# Altium PCB esp32c3phils.PcbDoc (part 1 of 3)
Units mil, origin at the board's own origin, x right, y up, seen from the top; angles counter-clockwise.
Board outline 2756.04 x 1955.51 mil, 6 copper layers (Top Layer, Layer 1, Layer 3, Layer 4, Layer 2, Bottom Layer), stack 54.512 mil thick; 66 components, 48 nets, 263 pads, 93 vias.
Unrouted connection lines stored in the file: 25.
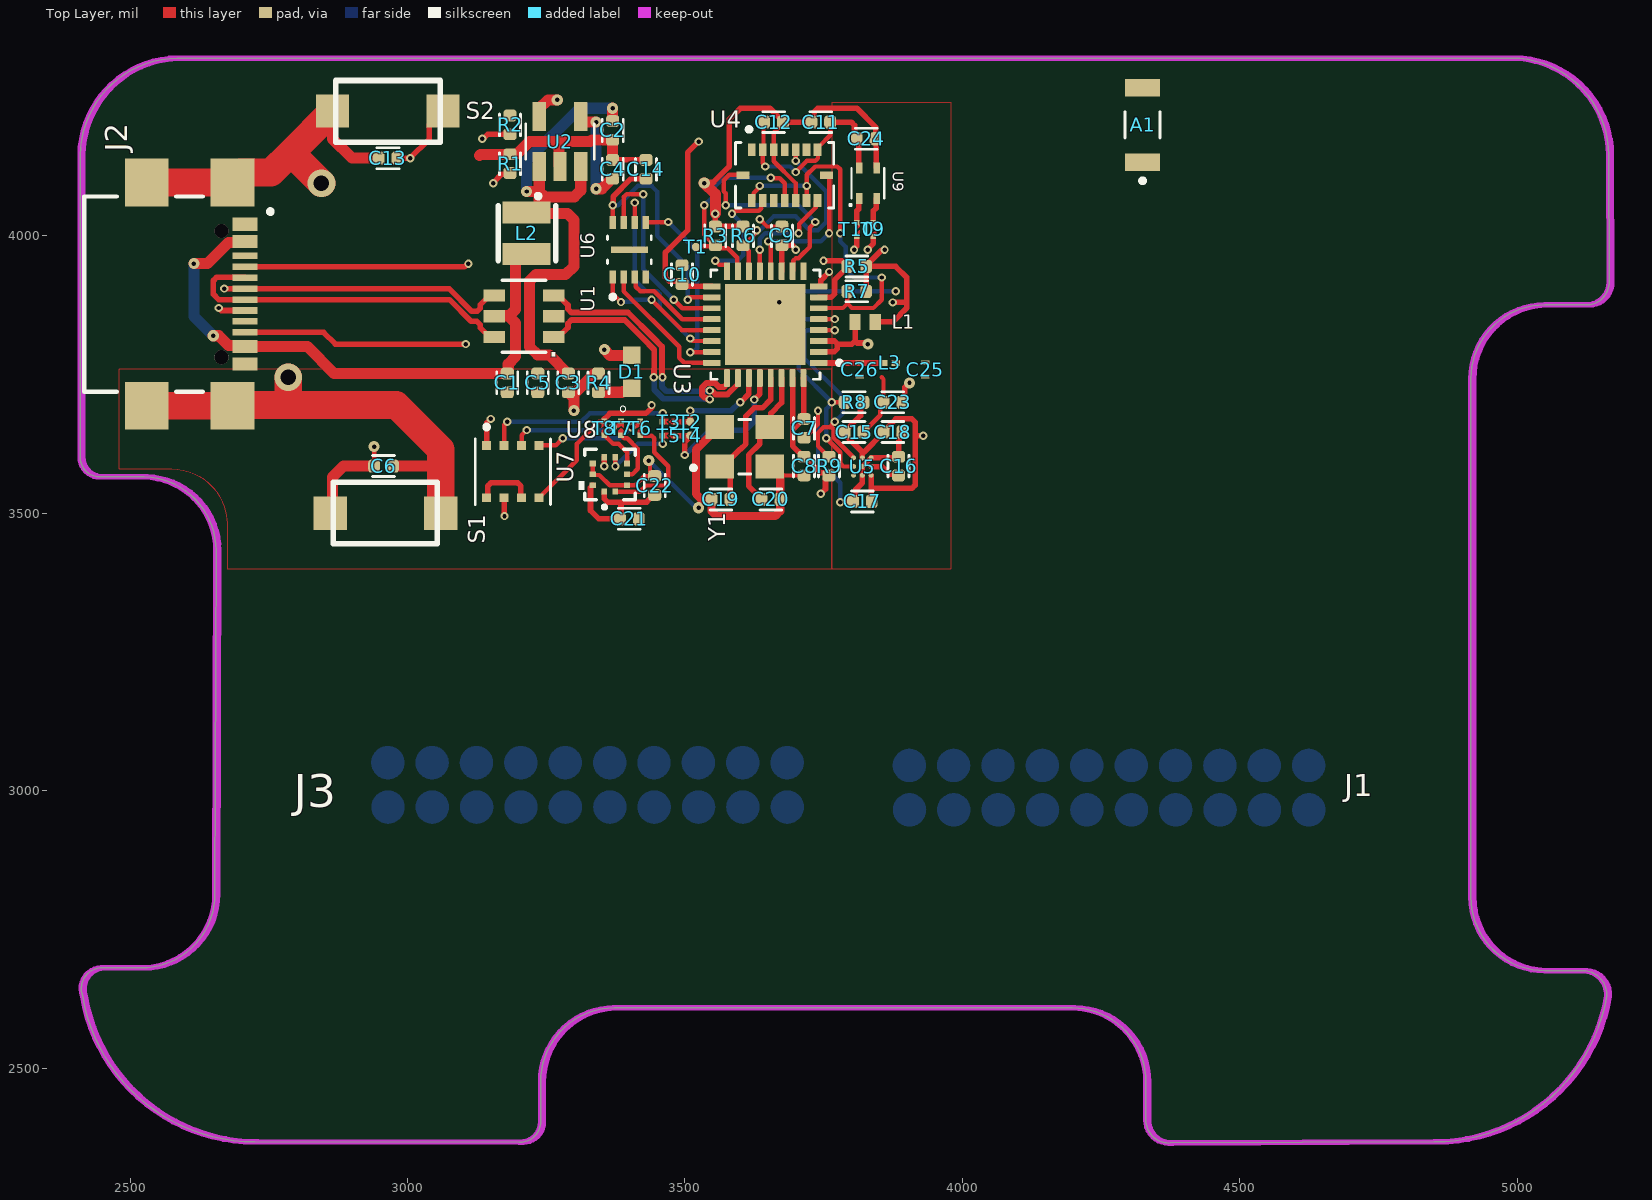
[diagram p0: Top Layer view]
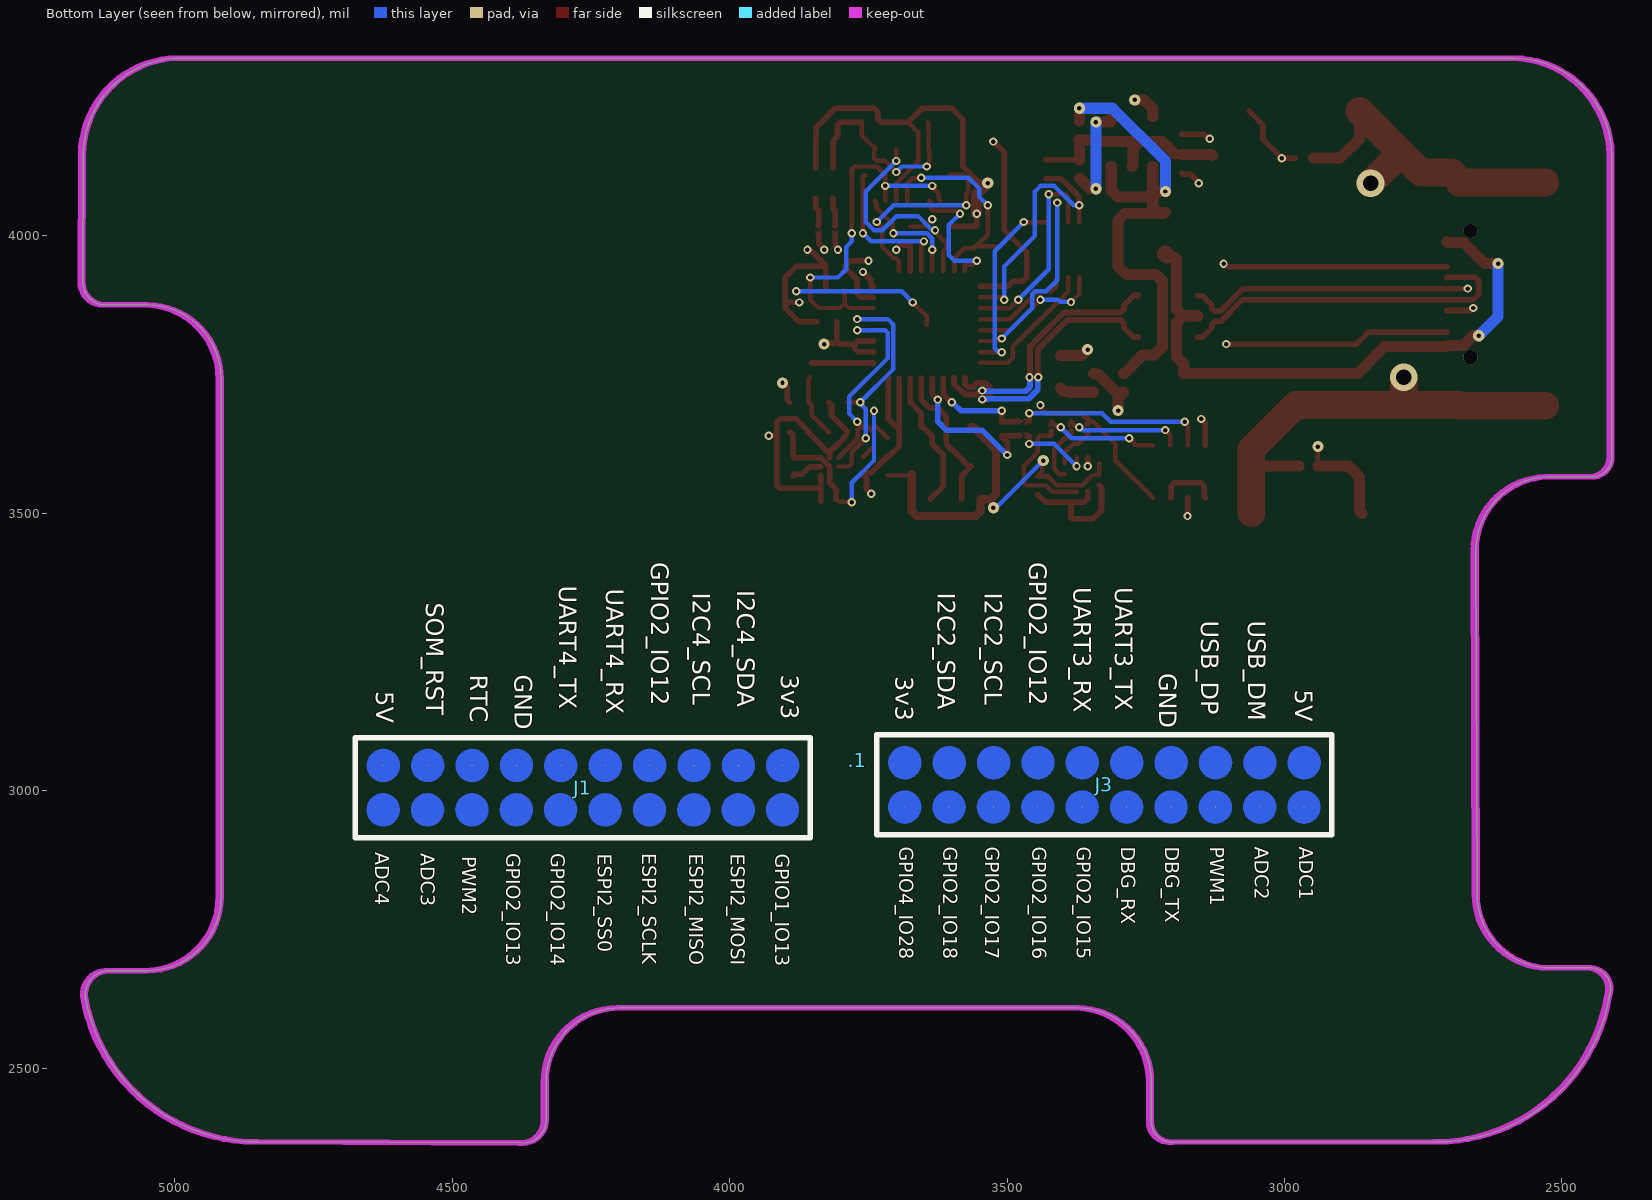
[diagram p1: Bottom Layer view, seen from below]
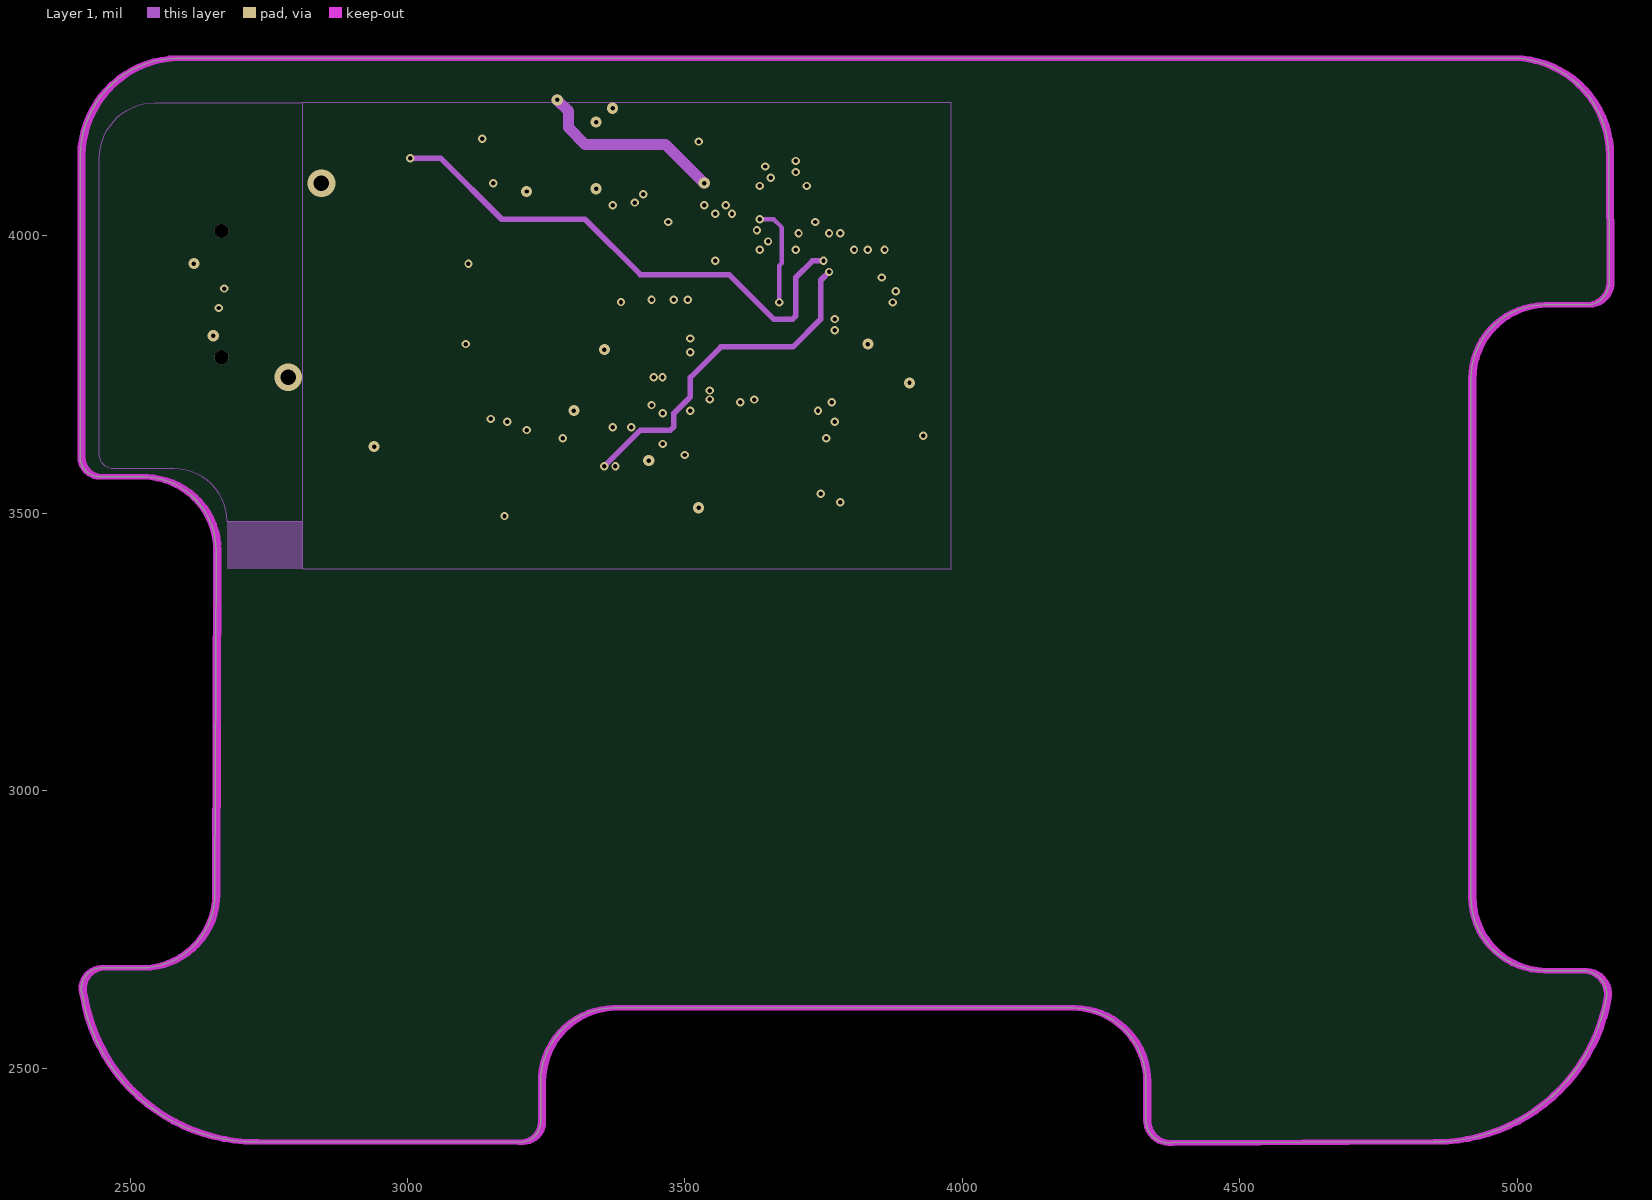
[diagram p2: Layer 1]
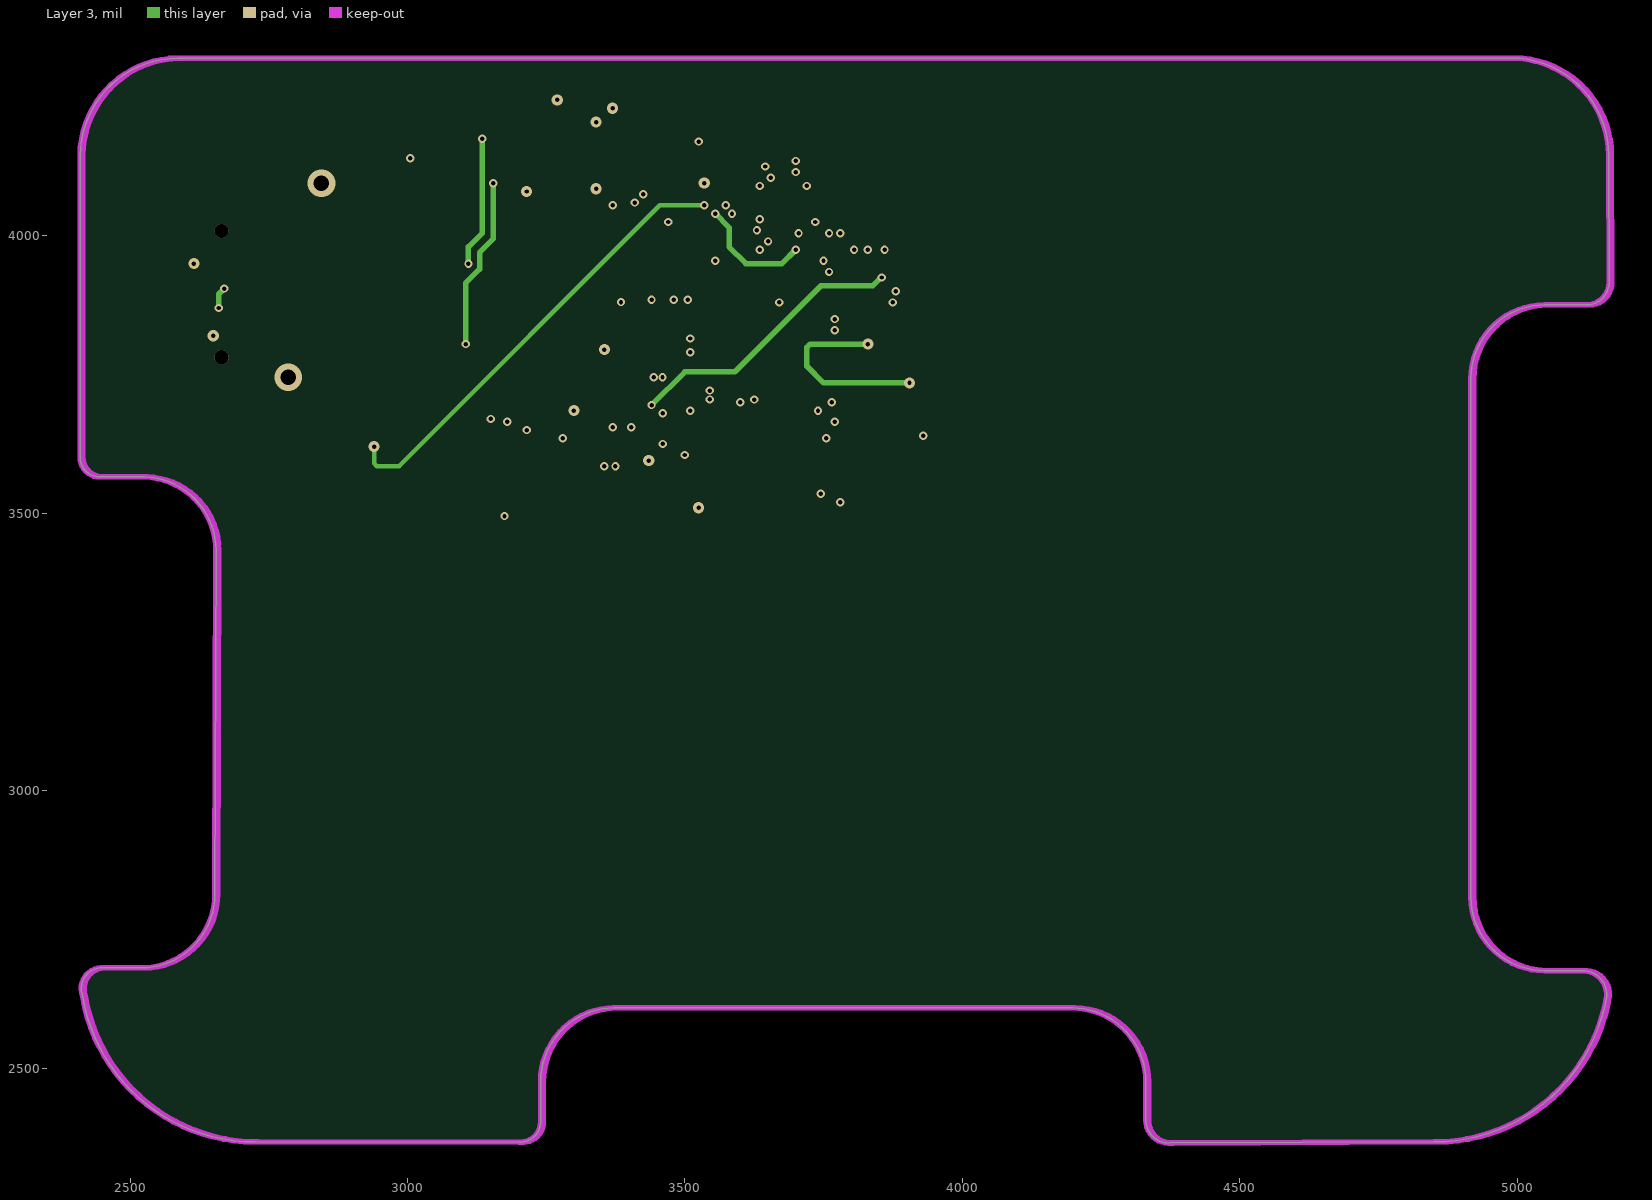
[diagram p3: Layer 3]
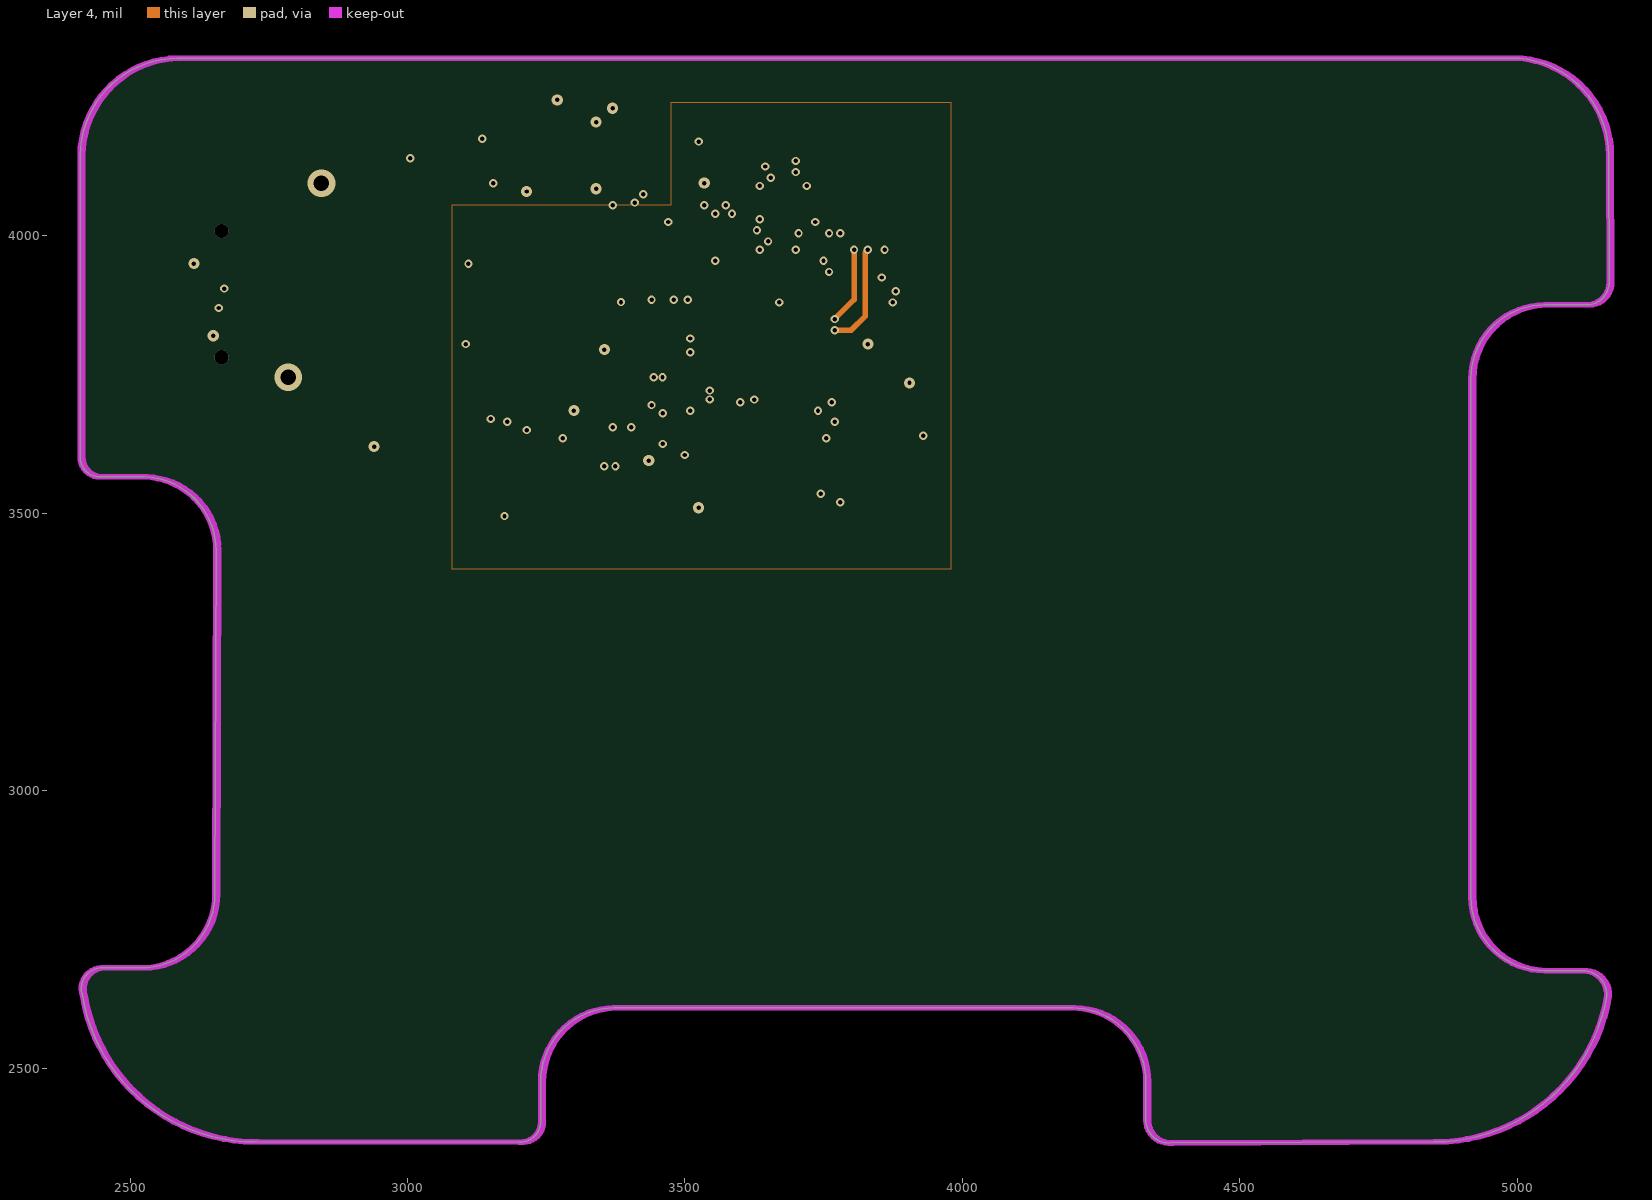
[diagram p4: Layer 4]
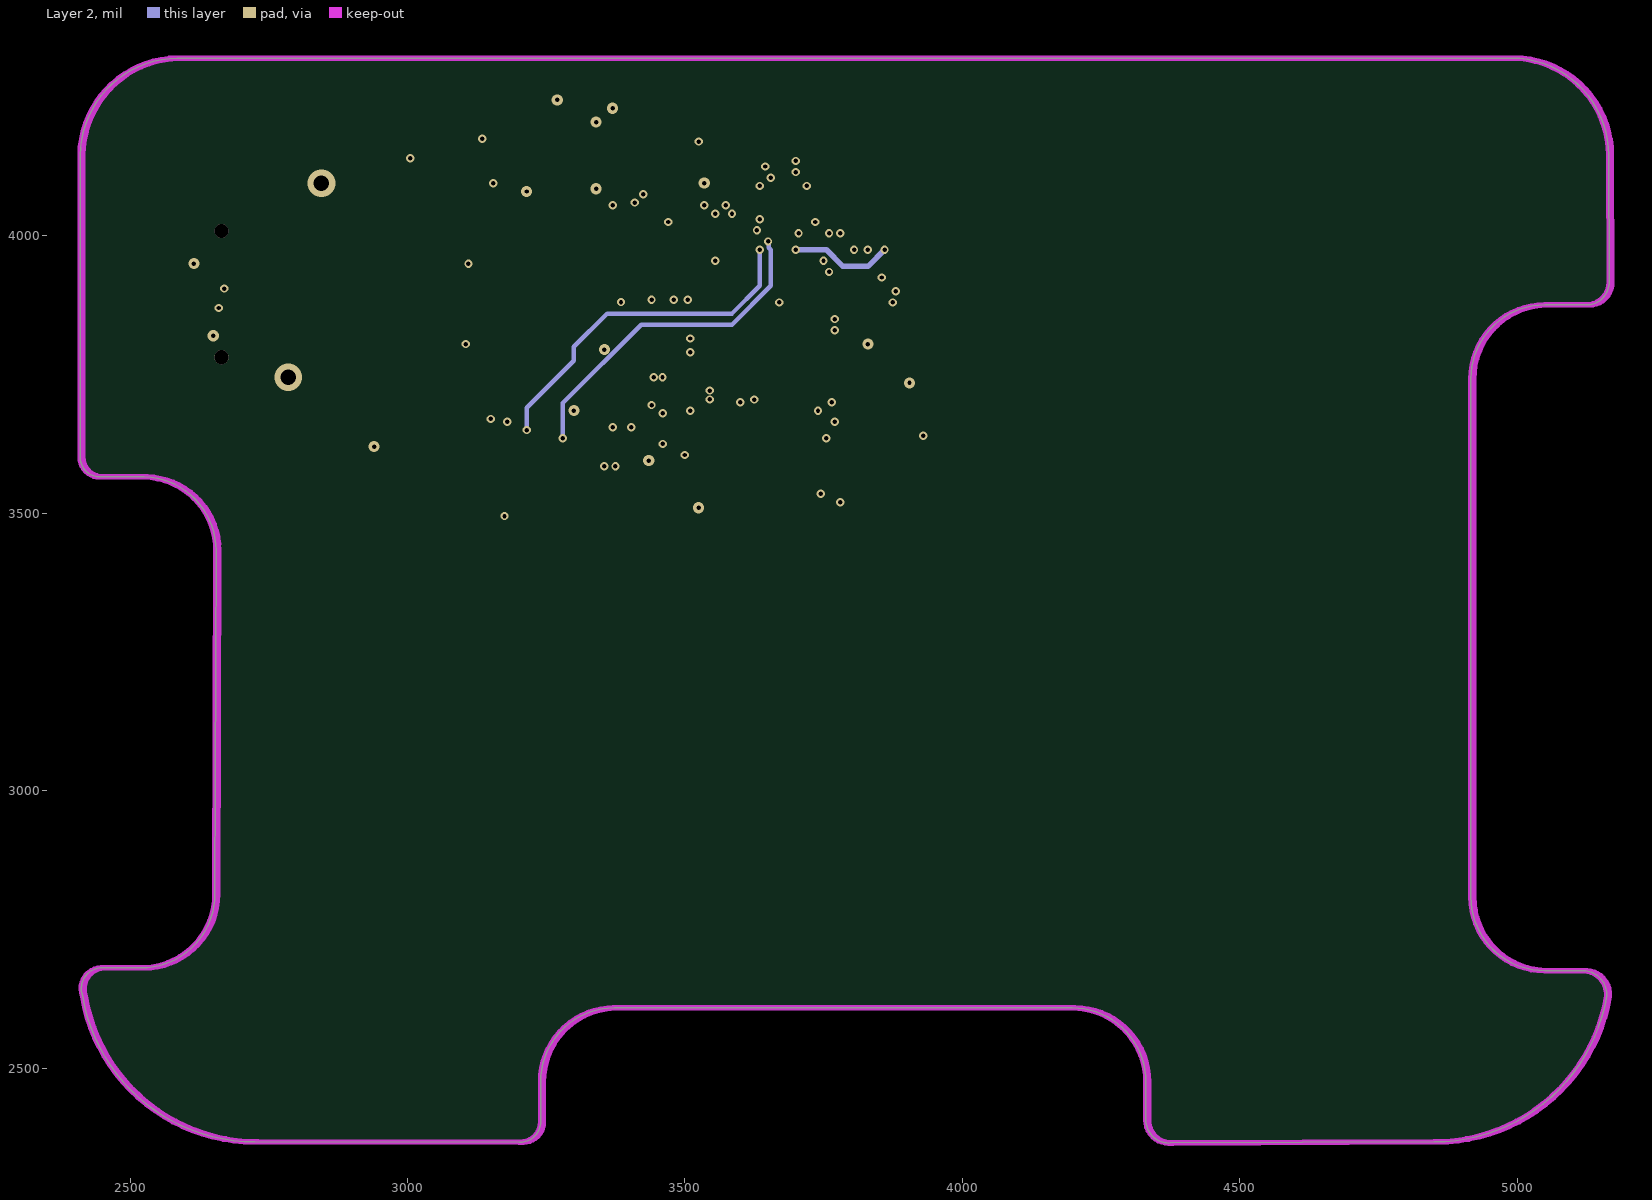
[diagram p5: Layer 2]
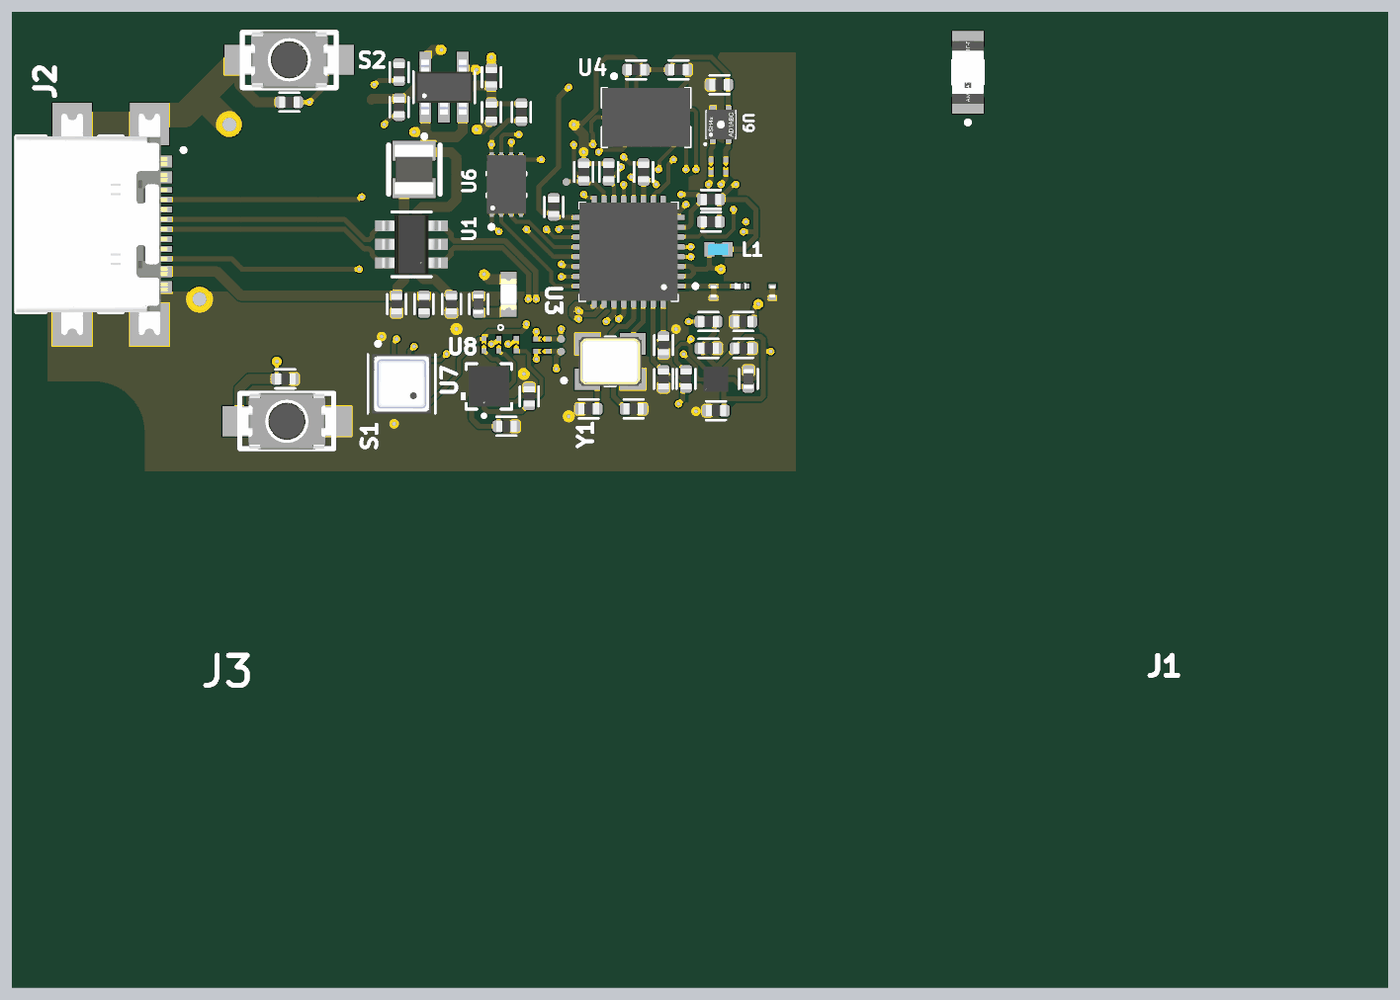
[diagram p7: 3D render of the assembled board from above, using the file's embedded part models]

## Layer stack, top to bottom
Top Solder: solder mask 0.4, Solder Resist, Dk 3.5
Top Layer: signal copper 1.4
Dielectric 2: prepreg 2.8, PP-006, Dk 4.1
Layer 1: signal copper 1.378
Dielectric 4: prepreg 2.8, PP-006, Dk 4.1
Layer 3: signal copper 1.378
Dielectric 1: core 35, Core-041, Dk 4.8
Layer 4: signal copper 1.378
Dielectric 5: prepreg 2.8, PP-006, Dk 4.1
Layer 2: signal copper 1.378
Dielectric 3: prepreg 2.8, PP-006, Dk 4.1
Bottom Layer: signal copper 1.4
Bottom Solder: solder mask 0.4, Solder Resist, Dk 3.5

## Board outline
2414.64,2629.47 ccw(c2725.14,2681.79) 2725,2366.91 3201.38,2366.6 3204.03,2366.61 ccw(c3204.03,2402.59) 3240.01,2402.59 3240,2475.41 cw(c3373.07,2475.41) 3373.07,2608.48 4198.07,2608.48 cw(c4198.08,2475.41) 4331.15,2475.41 4331.1,2475.45 4331.1,2405.95 4331.07,2405.98 ccw(c4372.11,2405.98) 4372.11,2364.95 4374.61,2365 4850.98,2366.91 ccw(c4850.98,2681.87) 5161.53,2629.35 ccw(c5118.26,2632.4) 5120.24,2675.73 5120.86,2675.45 5050,2675.45 cw(c5050,2808.52) 4916.93,2808.52 4916.93,3742.38 cw(c5050,3742.38) 5050,3875.45 5125,3875.45 ccw(c5125,3916.49) 5166.04,3916.49 5165,4145.45 ccw(c4990,4145.45) 4990,4320.45 2585,4320.45 ccw(c2587.5,4142.95) 2410,4145.2 2410,3600.45 2410.05,3601.43 ccw(c2446.02,3601.43) 2446.02,3565.45 2525,3565.45 2526.01,3565.42 cw(c2522.5,3432.97) 2655,3432.97 2655,3435.45 2653.07,2813.53 cw(c2520,2813.52) 2520,2680.45 2455,2680.49 ccw(c2450,2642.97)

## Design rules (kind name [scope] priority, off if disabled: settings)
Clearance Clearance_RF [InNetClass('RF')] p1: gap=1 ignorepadtopadclearanceinfootprint=FALSE except(0: Arc-Hole Track-Hole SMDPad-Hole THPad-Hole Via-Hole Fill-Hole Poly-Hole Region-Hole Text-Hole; 4: Track-Poly SMDPad-Poly THPad-Poly Via-Poly)
Clearance [NOT INNetClass('RF')] p2: gap=1 ignorepadtopadclearanceinfootprint=FALSE except(0: Arc-Hole Track-Hole SMDPad-Hole THPad-Hole Via-Hole Fill-Hole Poly-Hole Region-Hole Text-Hole; 3: Track-Poly SMDPad-Poly THPad-Poly Via-Poly)
ComponentClearance [All] p1: gap=5 collisioncheckmode=3 verticalgap=5 showdistances=FALSE
DiffPairsRouting [InDifferentialPair('USB2')] p1: maxlimit=8 minlimit=2 mostfreqgap=5 toplayer_mingap=3 toplayer_maxgap=3 toplayer_prefgap=3 toplayer_minwidth=10.6 toplayer_maxwidth=10.6 toplayer_prefwidth=10.6 midlayer1_minwidth=15 midlayer1_maxwidth=15 midlayer1_prefwidth=1.71 midlayer2_minwidth=15 midlayer2_maxwidth=15 midlayer2_prefwidth=2.29 midlayer3_minwidth=15 midlayer3_maxwidth=15 midlayer3_prefwidth=2.29 midlayer4_minwidth=15 midlayer4_maxwidth=15 midlayer4_prefwidth=1.71 bottomlayer_mingap=3 bottomlayer_maxgap=3 bottomlayer_prefgap=3 bottomlayer_minwidth=10.6 bottomlayer_maxwidth=10.6 bottomlayer_prefwidth=10.6 impedanceprofiledriven=TRUE impedanceprofileid={8FD7E2D9-7964-421B-845E-F3E801E4E64C} impedanceprofilevalue=90.000000 maxuncoupledlength=500
PolygonConnect [All] p1: connectstyle=Direct reliefconductorwidth=10 reliefentries=4 polygonreliefangle="90 Angle" airgapwidth=10
RoomDefinition esp32c3phils [InComponentClass('esp32c3phils')] p1: confinementstyle=ConfineOut formatcopy=TRUE lockcomponents=FALSE outline 4555,4120 4555,4170 4470,4170 4470,4120
RoutingVias [All] p1: holewidth=8 width=20 viastyle="Through Hole" minholewidth=8 minwidth=15 maxholewidth=28 maxwidth=50
SolderMaskExpansion [All] p1: expansion=2 istentingtop=FALSE
Width WidthRF [InNetClass('RF')] p1: maxlimit=10.6 minlimit=10.6 preferedwidth=10.6 midlayer1_prefwidth=1.45 midlayer4_prefwidth=1.45 impedanceprofiledriven=TRUE impedanceprofileid={8E2AE9DD-DE4D-46E3-B48A-83CCAB148859} impedanceprofilevalue=50.000000 minimp=50.000000 maximp=50.000000 favimp=50.000000
Width [All] p2: maxlimit=50 minlimit=8 preferedwidth=10
28 further rules are at their usual default settings.

## Classes and differential pairs
net class POWER: +3V3 AVDD
net class RF: ANT_IN LNA_IN
differential pair USB1: +USB1_P -USB1_N
differential pair USB2: +USB2_P -USB2_N

## Components (designator, comment, footprint, x,y, rotation, side; value= is the part's Value field where it differs from the comment)
.1 "_" ? 3770,3055 r0 bottom
A1 "ANT" XDCR_AMCA31-2R450G-S1F-T3 4325,4200 r90 top
C1 "104" CAPC1005X55N2 3180,3735 r270 top
C2 "104" CAPC1005X55N2 3370,4190 r270 top
C3 "C106" RC0402 3290,3735 r270 top
C4 "104" CAPC1005X55N2 3370,4120 r90 top
C5 "106" RC0402 3235,3735 r90 top
C6 "104" CAPC1005X55N2 2956.93,3585 r0 top
C7 "104" CAPC1005X55N2 3715,3653.07 r90 top
C8 "104" CAPC1005X55N2 3715,3585 r90 top
C9 "104" CAPC1005X55N2 3675,4000 r270 top
C10 "104" CAPC1005X55N2 3495,3930 r270 top
C11 "104" CAPC1005X55N2 3745,4205 r180 top
C12 "104" CAPC1005X55N2 3660,4205 r0 top
C13 "104" CAPC1005X55N2 2965,4140 r180 top
C14 "106" RC0402 3430,4120 r90 top
C15 "104" CAPC1005X55N2 3805,3646.38 r0 top
C16 "C225" RC0402X 3885.25,3585 r270 top
C17 "104" CAPC1005X55N2 3820,3521.38 r180 top
C18 "104" CAPC1005X55N2 3875,3646.38 r0 top
C19 "10" RC0402 3565,3525 r180 top
C20 "10" RC0402 3655,3525 r0 top
C21 "104" CAPC1005X55N2 3400,3490 r180 top
C22 "104" CAPC1005X55N2 3445.75,3550 r90 top
C23 "C106" RC0402 3875,3700 r180 top
C24 "C106" RC0402 3826.93,4175 r180 top
C25 "GRM0335C1E3R3BA01D" CAPC0603X33N 3933.2,3759.08 r90 top
C26 "GRM0335C1E3R3BA01D" CAPC0603X33N 3815.11,3759.08 r90 top
D1 "LED" LEDM1608X80 3404.25,3755 r90 top
J1 "PH2-20-UA" HEADERPAD_20_80MIL 4265,3005 r0 top
J2 "USB-C" GCT_USB4110GFA 2665,3895 r270 top locked
J3 "PH2-20-UA" HEADERPAD_20_80MIL 3325,3010 r0 top
L1 "IND2n2" INDC1006X60N 3825,3845 r0 top
L2 "SPH252010H2R2MT" IND-SMD_L2.5-W2.0_SWPA252012S 3215,4005 r270 top
L3 "2n2" INDC0603X33N 3868.92,3771.13 r180 top
R1 "5K1" RC0402 3185,4130 r90 top
R2 "5K1" RC0402 3185,4200 r90 top
R3 "5K1" RC0402 3555,4000 r270 top
R4 "ERA-2AEB202X" RC0402X 3344.5,3735 r90 top
R5 "5K1" RC0402 3810,3945 r180 top
R6 "5K1" RC0402 3605,4000 r270 top
R7 "5K1" RC0402 3810,3900 r180 top
R8 "5K1" RC0402 3805,3700 r180 top
R9 "5K1" RC0402 3760,3585 r90 top
S1 "SW_P" SW 2960,3500 r0 top
S2 "SW_P" SW 2965,4225 r180 top
T1 "TP" TP 3520,3980 r90 top
T2 "TP" TP 3510,3665 r180 top
T3 "JumpA" JUMPA 3470,3665 r180 top
T4 "TP" TP 3510,3640 r180 top
T5 "JumpA" JumpA 3470,3640 r180 top
T6 "JumpA" JumpA 3420,3655 r90 top
T7 "JumpA" JumpA 3385,3655 r90 top
T8 "JumpA" JumpA 3355,3655 r90 top
T9 "JumpA" JumpA 3840,4010 r270 top
T10 "JumpA" JumpA 3810,4010 r270 top
U1 "USBLC6" SOT23-6L_STM 3210,3855 r180 top
U2 "SPX3819M5-L-3-3" SOT95P280X145-5N 3275,4170 r90 top
U3 "ESP32-C3" QFN50P500X500X90-33N 3645,3840 r180 top
U4 "BMI088" PQFN50P450X300X100-16N 3680,4109.34 r0 top
U5 "BMM350" BGA9_BMM350_BOS 3820,3584.25 r90 top
U6 "W25Q16JVUXIQ_TR" IC_W25Q16JVUXIQ_TR 3400,3975 r90 top
U7 "BME688" IC_BME688 3190,3575 r90 top
U8 "BMP390" 10LGA_2X2X0P75_BOS 3365,3570 r90 top
U9 "SHT45-AD1B-R3" SHT4X 3830,4095 r90 top
Y1 "CRYSTAL 40.0000MHZ 18PF SMD" XTAL_ECS-400-18-33-JGN-TR3 3608.03,3620 r0 top

## Footprints (in the part's own frame and the unit in brackets; to place one, negate y for a bottom-side part, rotate by r counter-clockwise, add the part's x,y. Pads: shape width x height; smd on the part's side, far side on the other; paste and mask are expansions set on the pad)
10LGA_2X2X0P75_BOS [mil]
  rect 11x10 smd paste+0 mask+0: 1(-31,9.84) 2(-31,-9.84) 6(31,-9.84) 7(31,9.84)
  rect 10x11 smd paste+0 mask+0: 3(-19.68,-31) 4(0,-31) 5(19.68,-31) 8(19.68,31) 9(0,31) 10(-19.68,31)
  silkscreen extent -60,-46 46,56, body extent -41,-41 41,41, height 32
BGA9_BMM350_BOS [mil]
  round 9 smd paste+0 mask+0: A1(-15.75,15.75) A2(0,15.75) A3(15.75,15.75) B1(-15.75,0) B2(0,0) B3(15.75,0) C1(-15.75,-15.75) C2(0,-15.75) C3(15.75,-15.75)
  body extent -25,-25 25,25, height 21
CAPC0603X33N [mil]
  rect 8x15.75 smd mask+2: 1(-12,0) 2(12.06,0)
  body extent -11,-6 13,6, height 13
CAPC1005X55N2 [mm]
  rrect53% 0.54x0.6 smd: 1(-0.43,0) 2(0.43,0)
  silkscreen extent -0.5,-0.48 0.5,0.48, body extent -0.52,-0.28 0.52,0.28, height 0.56
GCT_USB4110GFA [mm]
  rect 0.6x1.15 smd: A1/B12(-3.2,1.075) A4/B9(-2.4,1.075) B1/A12(3.2,1.075) B4/A9(2.4,1.075)
  rect 0.3x1.15 smd: A5(-1.25,1.075) A6(-0.25,1.075) A7(0.25,1.075) A8(1.25,1.075) B5(1.75,1.075) B6(0.75,1.075) B7(-0.75,1.075) B8(-1.75,1.075)
  rect 2.18x2 smd: S1(-5.11,0.5) S2(5.11,0.5) S3(-5.11,-3.43) S4(5.11,-3.43)
  round 0.65 hole 0.65 unplated: ""(-2.89,0) ""(2.89,0)
  silkscreen extent -4.47,-6.28 4.47,2.33, body extent -5.65,-6.28 5.65,1.42, height 3.26
HEADERPAD_20_80MIL [mil]
  round 1 smd far side: 1(-360.28,40.45) 2(-280.56,40.45) 3(-200.56,40.45) 4(-120.56,40.45) 5(-40.56,40.45) 6(39.72,40.45) 7(119.44,40.45) 8(199.44,40.45) 9(279.44,40.45) 10(359.44,40.45) 11(-360,-39.55) 12(-280.28,-39.55) 13(-200.28,-39.55) 14(-120.28,-39.55) 15(-40.28,-39.55) 16(40,-39.55) 17(119.72,-39.55) 18(199.72,-39.55) 19(279.72,-39.55) 20(359.72,-39.55)
  Bottom Layer region: 329.72,40.45 329.76,42.01 329.88,43.56 330.09,45.1 330.37,46.63 330.73,48.14 331.18,49.64 331.69,51.1 332.29,52.54 332.96,53.95 333.7,55.31 334.52,56.64 335.4,57.92 336.34,59.16 337.35,60.34 338.43,61.47 339.56,62.54 340.74,63.55 341.97,64.5 343.26,65.38 344.58,66.19 345.95,66.94 347.35,67.61 348.79,68.2 350.26,68.72 351.75,69.16 353.26,69.53 354.8,69.81 356.34,70.01 357.89,70.14 359.44,70.18 361,70.14 362.55,70.01 364.09,69.81 365.62,69.53 367.14,69.16 368.63,68.72 370.1,68.2 371.53,67.61 372.94,66.94 374.31,66.19 375.63,65.38 376.92,64.5 378.15,63.55 379.33,62.54 380.46,61.47 381.53,60.34 382.55,59.16 383.49,57.92 384.37,56.64 385.19,55.31 385.93,53.95 386.6,52.54 387.19,51.1 387.71,49.64 388.16,48.14 388.52,46.63 388.8,45.1 389.01,43.56 389.13,42.01 389.17,40.45 389.13,38.89 389.01,37.34 388.8,35.8 388.52,34.27 388.16,32.76 387.71,31.27 387.19,29.8 386.6,28.36 385.93,26.96 385.19,25.59 384.37,24.26 383.49,22.98 382.55,21.74 381.53,20.56 380.46,19.43 379.33,18.36 378.15,17.35 376.92,16.4 375.63,15.52 374.31,14.71 372.94,13.97 371.53,13.3 370.1,12.7 368.63,12.18 367.14,11.74 365.62,11.38 364.09,11.09 362.55,10.89 361,10.77 359.44,10.73 357.89,10.77 356.34,10.89 354.8,11.09 353.26,11.38 351.75,11.74 350.26,12.18 348.79,12.7 347.35,13.3 345.95,13.97 344.58,14.71 343.26,15.52 341.97,16.4 340.74,17.35 339.56,18.36 338.43,19.43 337.35,20.56 336.34,21.74 335.4,22.98 334.52,24.26 333.7,25.59 332.96,26.96 332.29,28.36 331.69,29.8 331.18,31.27 330.73,32.76 330.37,34.27 330.09,35.8 329.88,37.34 329.76,38.89
  Bottom Layer region: 249.72,40.45 249.76,42.01 249.88,43.56 250.09,45.1 250.37,46.63 250.73,48.14 251.18,49.64 251.69,51.1 252.29,52.54 252.96,53.95 253.7,55.31 254.52,56.64 255.4,57.92 256.34,59.16 257.35,60.34 258.43,61.47 259.56,62.54 260.74,63.55 261.97,64.5 263.26,65.38 264.58,66.19 265.95,66.94 267.35,67.61 268.79,68.2 270.26,68.72 271.75,69.16 273.26,69.53 274.8,69.81 276.34,70.01 277.89,70.14 279.44,70.18 281,70.14 282.55,70.01 284.09,69.81 285.62,69.53 287.14,69.16 288.63,68.72 290.1,68.2 291.53,67.61 292.94,66.94 294.31,66.19 295.63,65.38 296.92,64.5 298.15,63.55 299.33,62.54 300.46,61.47 301.53,60.34 302.55,59.16 303.49,57.92 304.37,56.64 305.19,55.31 305.93,53.95 306.6,52.54 307.19,51.1 307.71,49.64 308.16,48.14 308.52,46.63 308.8,45.1 309.01,43.56 309.13,42.01 309.17,40.45 309.13,38.89 309.01,37.34 308.8,35.8 308.52,34.27 308.16,32.76 307.71,31.27 307.19,29.8 306.6,28.36 305.93,26.96 305.19,25.59 304.37,24.26 303.49,22.98 302.55,21.74 301.53,20.56 300.46,19.43 299.33,18.36 298.15,17.35 296.92,16.4 295.63,15.52 294.31,14.71 292.94,13.97 291.53,13.3 290.1,12.7 288.63,12.18 287.14,11.74 285.62,11.38 284.09,11.09 282.55,10.89 281,10.77 279.44,10.73 277.89,10.77 276.34,10.89 274.8,11.09 273.26,11.38 271.75,11.74 270.26,12.18 268.79,12.7 267.35,13.3 265.95,13.97 264.58,14.71 263.26,15.52 261.97,16.4 260.74,17.35 259.56,18.36 258.43,19.43 257.35,20.56 256.34,21.74 255.4,22.98 254.52,24.26 253.7,25.59 252.96,26.96 252.29,28.36 251.69,29.8 251.18,31.27 250.73,32.76 250.37,34.27 250.09,35.8 249.88,37.34 249.76,38.89
  Bottom Layer region: 169.72,40.45 169.76,42.01 169.88,43.56 170.09,45.1 170.37,46.63 170.73,48.14 171.18,49.64 171.69,51.1 172.29,52.54 172.96,53.95 173.7,55.31 174.52,56.64 175.4,57.92 176.34,59.16 177.35,60.34 178.43,61.47 179.56,62.54 180.74,63.55 181.97,64.5 183.26,65.38 184.58,66.19 185.95,66.94 187.35,67.61 188.79,68.2 190.26,68.72 191.75,69.16 193.26,69.53 194.8,69.81 196.34,70.01 197.89,70.14 199.44,70.18 201,70.14 202.55,70.01 204.09,69.81 205.62,69.53 207.14,69.16 208.63,68.72 210.1,68.2 211.53,67.61 212.94,66.94 214.31,66.19 215.63,65.38 216.92,64.5 218.15,63.55 219.33,62.54 220.46,61.47 221.53,60.34 222.55,59.16 223.49,57.92 224.37,56.64 225.19,55.31 225.93,53.95 226.6,52.54 227.19,51.1 227.71,49.64 228.16,48.14 228.52,46.63 228.8,45.1 229.01,43.56 229.13,42.01 229.17,40.45 229.13,38.89 229.01,37.34 228.8,35.8 228.52,34.27 228.16,32.76 227.71,31.27 227.19,29.8 226.6,28.36 225.93,26.96 225.19,25.59 224.37,24.26 223.49,22.98 222.55,21.74 221.53,20.56 220.46,19.43 219.33,18.36 218.15,17.35 216.92,16.4 215.63,15.52 214.31,14.71 212.94,13.97 211.53,13.3 210.1,12.7 208.63,12.18 207.14,11.74 205.62,11.38 204.09,11.09 202.55,10.89 201,10.77 199.44,10.73 197.89,10.77 196.34,10.89 194.8,11.09 193.26,11.38 191.75,11.74 190.26,12.18 188.79,12.7 187.35,13.3 185.95,13.97 184.58,14.71 183.26,15.52 181.97,16.4 180.74,17.35 179.56,18.36 178.43,19.43 177.35,20.56 176.34,21.74 175.4,22.98 174.52,24.26 173.7,25.59 172.96,26.96 172.29,28.36 171.69,29.8 171.18,31.27 170.73,32.76 170.37,34.27 170.09,35.8 169.88,37.34 169.76,38.89
  Bottom Layer region: 89.72,40.45 89.76,42.01 89.88,43.56 90.09,45.1 90.37,46.63 90.73,48.14 91.18,49.64 91.69,51.1 92.29,52.54 92.96,53.95 93.7,55.31 94.52,56.64 95.4,57.92 96.34,59.16 97.35,60.34 98.43,61.47 99.56,62.54 100.74,63.55 101.97,64.5 103.26,65.38 104.58,66.19 105.95,66.94 107.35,67.61 108.79,68.2 110.26,68.72 111.75,69.16 113.26,69.53 114.8,69.81 116.34,70.01 117.89,70.14 119.44,70.18 121,70.14 122.55,70.01 124.09,69.81 125.62,69.53 127.14,69.16 128.63,68.72 130.1,68.2 131.53,67.61 132.94,66.94 134.31,66.19 135.63,65.38 136.92,64.5 138.15,63.55 139.33,62.54 140.46,61.47 141.53,60.34 142.55,59.16 143.49,57.92 144.37,56.64 145.19,55.31 145.93,53.95 146.6,52.54 147.19,51.1 147.71,49.64 148.16,48.14 148.52,46.63 148.8,45.1 149.01,43.56 149.13,42.01 149.17,40.45 149.13,38.89 149.01,37.34 148.8,35.8 148.52,34.27 148.16,32.76 147.71,31.27 147.19,29.8 146.6,28.36 145.93,26.96 145.19,25.59 144.37,24.26 143.49,22.98 142.55,21.74 141.53,20.56 140.46,19.43 139.33,18.36 138.15,17.35 136.92,16.4 135.63,15.52 134.31,14.71 132.94,13.97 131.53,13.3 130.1,12.7 128.63,12.18 127.14,11.74 125.62,11.38 124.09,11.09 122.55,10.89 121,10.77 119.44,10.73 117.89,10.77 116.34,10.89 114.8,11.09 113.26,11.38 111.75,11.74 110.26,12.18 108.79,12.7 107.35,13.3 105.95,13.97 104.58,14.71 103.26,15.52 101.97,16.4 100.74,17.35 99.56,18.36 98.43,19.43 97.35,20.56 96.34,21.74 95.4,22.98 94.52,24.26 93.7,25.59 92.96,26.96 92.29,28.36 91.69,29.8 91.18,31.27 90.73,32.76 90.37,34.27 90.09,35.8 89.88,37.34 89.76,38.89
  Bottom Layer region: 10,40.45 10.04,42.01 10.16,43.56 10.36,45.1 10.65,46.63 11.01,48.14 11.45,49.64 11.97,51.1 12.57,52.54 13.24,53.95 13.98,55.31 14.79,56.64 15.67,57.92 16.62,59.16 17.63,60.34 18.7,61.47 19.83,62.54 21.01,63.55 22.25,64.5 23.53,65.38 24.86,66.19 26.23,66.94 27.63,67.61 29.07,68.2 30.53,68.72 32.03,69.16 33.54,69.53 35.07,69.81 36.61,70.01 38.16,70.14 39.72,70.18 41.28,70.14 42.83,70.01 44.37,69.81 45.9,69.53 47.41,69.16 48.91,68.72 50.37,68.2 51.81,67.61 53.22,66.94 54.58,66.19 55.91,65.38 57.19,64.5 58.43,63.55 59.61,62.54 60.74,61.47 61.81,60.34 62.82,59.16 63.77,57.92 64.65,56.64 65.46,55.31 66.2,53.95 66.88,52.54 67.47,51.1 67.99,49.64 68.43,48.14 68.8,46.63 69.08,45.1 69.28,43.56 69.4,42.01 69.44,40.45 69.4,38.89 69.28,37.34 69.08,35.8 68.8,34.27 68.43,32.76 67.99,31.27 67.47,29.8 66.88,28.36 66.2,26.96 65.46,25.59 64.65,24.26 63.77,22.98 62.82,21.74 61.81,20.56 60.74,19.43 59.61,18.36 58.43,17.35 57.19,16.4 55.91,15.52 54.58,14.71 53.22,13.97 51.81,13.3 50.37,12.7 48.91,12.18 47.41,11.74 45.9,11.38 44.37,11.09 42.83,10.89 41.28,10.77 39.72,10.73 38.16,10.77 36.61,10.89 35.07,11.09 33.54,11.38 32.03,11.74 30.53,12.18 29.07,12.7 27.63,13.3 26.23,13.97 24.86,14.71 23.53,15.52 22.25,16.4 21.01,17.35 19.83,18.36 18.7,19.43 17.63,20.56 16.62,21.74 15.67,22.98 14.79,24.26 13.98,25.59 13.24,26.96 12.57,28.36 11.97,29.8 11.45,31.27 11.01,32.76 10.65,34.27 10.36,35.8 10.16,37.34 10.04,38.89
  Bottom Layer region: -70.28,40.45 -70.24,42.01 -70.12,43.56 -69.91,45.1 -69.63,46.63 -69.27,48.14 -68.82,49.64 -68.31,51.1 -67.71,52.54 -67.04,53.95 -66.3,55.31 -65.48,56.64 -64.6,57.92 -63.66,59.16 -62.65,60.34 -61.57,61.47 -60.44,62.54 -59.26,63.55 -58.03,64.5 -56.74,65.38 -55.42,66.19 -54.05,66.94 -52.65,67.61 -51.21,68.2 -49.74,68.72 -48.25,69.16 -46.74,69.53 -45.2,69.81 -43.66,70.01 -42.11,70.14 -40.56,70.18 -39,70.14 -37.45,70.01 -35.91,69.81 -34.38,69.53 -32.86,69.16 -31.37,68.72 -29.9,68.2 -28.47,67.61 -27.06,66.94 -25.69,66.19 -24.37,65.38 -23.08,64.5 -21.85,63.55 -20.67,62.54 -19.54,61.47 -18.47,60.34 -17.45,59.16 -16.51,57.92 -15.63,56.64 -14.81,55.31 -14.07,53.95 -13.4,52.54 -12.81,51.1 -12.29,49.64 -11.84,48.14 -11.48,46.63 -11.2,45.1 -10.99,43.56 -10.87,42.01 -10.83,40.45 -10.87,38.89 -10.99,37.34 -11.2,35.8 -11.48,34.27 -11.84,32.76 -12.29,31.27 -12.81,29.8 -13.4,28.36 -14.07,26.96 -14.81,25.59 -15.63,24.26 -16.51,22.98 -17.45,21.74 -18.47,20.56 -19.54,19.43 -20.67,18.36 -21.85,17.35 -23.08,16.4 -24.37,15.52 -25.69,14.71 -27.06,13.97 -28.47,13.3 -29.9,12.7 -31.37,12.18 -32.86,11.74 -34.38,11.38 -35.91,11.09 -37.45,10.89 -39,10.77 -40.56,10.73 -42.11,10.77 -43.66,10.89 -45.2,11.09 -46.74,11.38 -48.25,11.74 -49.74,12.18 -51.21,12.7 -52.65,13.3 -54.05,13.97 -55.42,14.71 -56.74,15.52 -58.03,16.4 -59.26,17.35 -60.44,18.36 -61.57,19.43 -62.65,20.56 -63.66,21.74 -64.6,22.98 -65.48,24.26 -66.3,25.59 -67.04,26.96 -67.71,28.36 -68.31,29.8 -68.82,31.27 -69.27,32.76 -69.63,34.27 -69.91,35.8 -70.12,37.34 -70.24,38.89
  Bottom Layer region: -150.28,40.45 -150.24,42.01 -150.12,43.56 -149.91,45.1 -149.63,46.63 -149.27,48.14 -148.82,49.64 -148.31,51.1 -147.71,52.54 -147.04,53.95 -146.3,55.31 -145.48,56.64 -144.6,57.92 -143.66,59.16 -142.65,60.34 -141.57,61.47 -140.44,62.54 -139.26,63.55 -138.03,64.5 -136.74,65.38 -135.42,66.19 -134.05,66.94 -132.65,67.61 -131.21,68.2 -129.74,68.72 -128.25,69.16 -126.74,69.53 -125.2,69.81 -123.66,70.01 -122.11,70.14 -120.56,70.18 -119,70.14 -117.45,70.01 -115.91,69.81 -114.38,69.53 -112.86,69.16 -111.37,68.72 -109.9,68.2 -108.47,67.61 -107.06,66.94 -105.69,66.19 -104.37,65.38 -103.08,64.5 -101.85,63.55 -100.67,62.54 -99.54,61.47 -98.47,60.34 -97.45,59.16 -96.51,57.92 -95.63,56.64 -94.81,55.31 -94.07,53.95 -93.4,52.54 -92.81,51.1 -92.29,49.64 -91.84,48.14 -91.48,46.63 -91.2,45.1 -90.99,43.56 -90.87,42.01 -90.83,40.45 -90.87,38.89 -90.99,37.34 -91.2,35.8 -91.48,34.27 -91.84,32.76 -92.29,31.27 -92.81,29.8 -93.4,28.36 -94.07,26.96 -94.81,25.59 -95.63,24.26 -96.51,22.98 -97.45,21.74 -98.47,20.56 -99.54,19.43 -100.67,18.36 -101.85,17.35 -103.08,16.4 -104.37,15.52 -105.69,14.71 -107.06,13.97 -108.47,13.3 -109.9,12.7 -111.37,12.18 -112.86,11.74 -114.38,11.38 -115.91,11.09 -117.45,10.89 -119,10.77 -120.56,10.73 -122.11,10.77 -123.66,10.89 -125.2,11.09 -126.74,11.38 -128.25,11.74 -129.74,12.18 -131.21,12.7 -132.65,13.3 -134.05,13.97 -135.42,14.71 -136.74,15.52 -138.03,16.4 -139.26,17.35 -140.44,18.36 -141.57,19.43 -142.65,20.56 -143.66,21.74 -144.6,22.98 -145.48,24.26 -146.3,25.59 -147.04,26.96 -147.71,28.36 -148.31,29.8 -148.82,31.27 -149.27,32.76 -149.63,34.27 -149.91,35.8 -150.12,37.34 -150.24,38.89
  Bottom Layer region: -230.28,40.45 -230.24,42.01 -230.12,43.56 -229.91,45.1 -229.63,46.63 -229.27,48.14 -228.82,49.64 -228.31,51.1 -227.71,52.54 -227.04,53.95 -226.3,55.31 -225.49,56.64 -224.6,57.92 -223.66,59.16 -222.64,60.34 -221.57,61.47 -220.45,62.54 -219.26,63.55 -218.03,64.5 -216.74,65.38 -215.42,66.19 -214.05,66.94 -212.65,67.61 -211.21,68.2 -209.74,68.72 -208.25,69.16 -206.74,69.53 -205.2,69.81 -203.66,70.01 -202.11,70.14 -200.55,70.18 -199,70.14 -197.45,70.01 -195.91,69.81 -194.38,69.53 -192.86,69.16 -191.37,68.72 -189.9,68.2 -188.47,67.61 -187.06,66.94 -185.69,66.19 -184.37,65.38 -183.08,64.5 -181.85,63.55 -180.67,62.54 -179.54,61.47 -178.47,60.34 -177.45,59.16 -176.51,57.92 -175.63,56.64 -174.81,55.31 -174.07,53.95 -173.4,52.54 -172.8,51.1 -172.29,49.64 -171.84,48.14 -171.48,46.63 -171.2,45.1 -170.99,43.56 -170.87,42.01 -170.83,40.45 -170.87,38.89 -170.99,37.34 -171.2,35.8 -171.48,34.27 -171.84,32.76 -172.29,31.27 -172.8,29.8 -173.4,28.36 -174.07,26.96 -174.81,25.59 -175.63,24.26 -176.51,22.98 -177.45,21.74 -178.47,20.56 -179.54,19.43 -180.67,18.36 -181.85,17.35 -183.08,16.4 -184.37,15.52 -185.69,14.71 -187.06,13.97 -188.47,13.3 -189.9,12.7 -191.37,12.18 -192.86,11.74 -194.38,11.38 -195.91,11.09 -197.45,10.89 -199,10.77 -200.55,10.73 -202.11,10.77 -203.66,10.89 -205.2,11.09 -206.74,11.38 -208.25,11.74 -209.74,12.18 -211.21,12.7 -212.65,13.3 -214.05,13.97 -215.42,14.71 -216.74,15.52 -218.03,16.4 -219.26,17.35 -220.45,18.36 -221.57,19.43 -222.64,20.56 -223.66,21.74 -224.6,22.98 -225.49,24.26 -226.3,25.59 -227.04,26.96 -227.71,28.36 -228.31,29.8 -228.82,31.27 -229.27,32.76 -229.63,34.27 -229.91,35.8 -230.12,37.34 -230.24,38.89
  Bottom Layer region: -310.28,40.45 -310.24,42.01 -310.12,43.56 -309.91,45.1 -309.63,46.63 -309.27,48.14 -308.82,49.64 -308.31,51.1 -307.71,52.54 -307.04,53.95 -306.3,55.31 -305.49,56.64 -304.6,57.92 -303.66,59.16 -302.64,60.34 -301.57,61.47 -300.45,62.54 -299.26,63.55 -298.03,64.5 -296.74,65.38 -295.42,66.19 -294.05,66.94 -292.65,67.61 -291.21,68.2 -289.74,68.72 -288.25,69.16 -286.74,69.53 -285.2,69.81 -283.66,70.01 -282.11,70.14 -280.55,70.18 -279,70.14 -277.45,70.01 -275.91,69.81 -274.38,69.53 -272.86,69.16 -271.37,68.72 -269.9,68.2 -268.47,67.61 -267.06,66.94 -265.69,66.19 -264.37,65.38 -263.08,64.5 -261.85,63.55 -260.67,62.54 -259.54,61.47 -258.47,60.34 -257.45,59.16 -256.51,57.92 -255.63,56.64 -254.81,55.31 -254.07,53.95 -253.4,52.54 -252.8,51.1 -252.29,49.64 -251.84,48.14 -251.48,46.63 -251.2,45.1 -250.99,43.56 -250.87,42.01 -250.83,40.45 -250.87,38.89 -250.99,37.34 -251.2,35.8 -251.48,34.27 -251.84,32.76 -252.29,31.27 -252.8,29.8 -253.4,28.36 -254.07,26.96 -254.81,25.59 -255.63,24.26 -256.51,22.98 -257.45,21.74 -258.47,20.56 -259.54,19.43 -260.67,18.36 -261.85,17.35 -263.08,16.4 -264.37,15.52 -265.69,14.71 -267.06,13.97 -268.47,13.3 -269.9,12.7 -271.37,12.18 -272.86,11.74 -274.38,11.38 -275.91,11.09 -277.45,10.89 -279,10.77 -280.55,10.73 -282.11,10.77 -283.66,10.89 -285.2,11.09 -286.74,11.38 -288.25,11.74 -289.74,12.18 -291.21,12.7 -292.65,13.3 -294.05,13.97 -295.42,14.71 -296.74,15.52 -298.03,16.4 -299.26,17.35 -300.45,18.36 -301.57,19.43 -302.64,20.56 -303.66,21.74 -304.6,22.98 -305.49,24.26 -306.3,25.59 -307.04,26.96 -307.71,28.36 -308.31,29.8 -308.82,31.27 -309.27,32.76 -309.63,34.27 -309.91,35.8 -310.12,37.34 -310.24,38.89
  Bottom Layer region: -390,40.45 -389.96,42.01 -389.84,43.56 -389.64,45.1 -389.35,46.63 -388.99,48.14 -388.55,49.64 -388.03,51.1 -387.43,52.54 -386.76,53.95 -386.02,55.31 -385.21,56.64 -384.33,57.92 -383.38,59.16 -382.37,60.34 -381.3,61.47 -380.17,62.54 -378.99,63.55 -377.75,64.5 -376.47,65.38 -375.14,66.19 -373.77,66.94 -372.37,67.61 -370.93,68.2 -369.47,68.72 -367.97,69.16 -366.46,69.53 -364.93,69.81 -363.39,70.01 -361.84,70.14 -360.28,70.18 -358.72,70.14 -357.17,70.01 -355.63,69.81 -354.1,69.53 -352.59,69.16 -351.09,68.72 -349.63,68.2 -348.19,67.61 -346.78,66.94 -345.42,66.19 -344.09,65.38 -342.81,64.5 -341.57,63.55 -340.39,62.54 -339.26,61.47 -338.19,60.34 -337.18,59.16 -336.23,57.92 -335.35,56.64 -334.54,55.31 -333.8,53.95 -333.12,52.54 -332.53,51.1 -332.01,49.64 -331.57,48.14 -331.2,46.63 -330.92,45.1 -330.72,43.56 -330.6,42.01 -330.55,40.45 -330.6,38.89 -330.72,37.34 -330.92,35.8 -331.2,34.27 -331.57,32.76 -332.01,31.27 -332.53,29.8 -333.12,28.36 -333.8,26.96 -334.54,25.59 -335.35,24.26 -336.23,22.98 -337.18,21.74 -338.19,20.56 -339.26,19.43 -340.39,18.36 -341.57,17.35 -342.81,16.4 -344.09,15.52 -345.42,14.71 -346.78,13.97 -348.19,13.3 -349.63,12.7 -351.09,12.18 -352.59,11.74 -354.1,11.38 -355.63,11.09 -357.17,10.89 -358.72,10.77 -360.28,10.73 -361.84,10.77 -363.39,10.89 -364.93,11.09 -366.46,11.38 -367.97,11.74 -369.47,12.18 -370.93,12.7 -372.37,13.3 -373.77,13.97 -375.14,14.71 -376.47,15.52 -377.75,16.4 -378.99,17.35 -380.17,18.36 -381.3,19.43 -382.37,20.56 -383.38,21.74 -384.33,22.98 -385.21,24.26 -386.02,25.59 -386.76,26.96 -387.43,28.36 -388.03,29.8 -388.55,31.27 -388.99,32.76 -389.35,34.27 -389.64,35.8 -389.84,37.34 -389.96,38.89
  Bottom Layer region: -389.73,-39.55 -389.69,-37.99 -389.57,-36.44 -389.36,-34.9 -389.08,-33.37 -388.72,-31.86 -388.27,-30.36 -387.75,-28.9 -387.16,-27.46 -386.49,-26.05 -385.75,-24.69 -384.93,-23.36 -384.05,-22.08 -383.1,-20.84 -382.09,-19.66 -381.02,-18.53 -379.89,-17.46 -378.71,-16.45 -377.47,-15.5 -376.19,-14.62 -374.87,-13.81 -373.5,-13.07 -372.09,-12.39 -370.66,-11.8 -369.19,-11.28 -367.7,-10.84 -366.18,-10.47 -364.65,-10.19 -363.11,-9.99 -361.56,-9.87 -360,-9.82 -358.45,-9.87 -356.9,-9.99 -355.35,-10.19 -353.82,-10.47 -352.31,-10.84 -350.82,-11.28 -349.35,-11.8 -347.91,-12.39 -346.51,-13.07 -345.14,-13.81 -343.82,-14.62 -342.53,-15.5 -341.3,-16.45 -340.11,-17.46 -338.99,-18.53 -337.91,-19.66 -336.9,-20.84 -335.96,-22.08 -335.07,-23.36 -334.26,-24.69 -333.52,-26.05 -332.85,-27.46 -332.25,-28.9 -331.74,-30.36 -331.29,-31.86 -330.93,-33.37 -330.65,-34.9 -330.44,-36.44 -330.32,-37.99 -330.28,-39.55 -330.32,-41.11 -330.44,-42.66 -330.65,-44.2 -330.93,-45.73 -331.29,-47.24 -331.74,-48.73 -332.25,-50.2 -332.85,-51.64 -333.52,-53.04 -334.26,-54.41 -335.07,-55.74 -335.96,-57.02 -336.9,-58.26 -337.91,-59.44 -338.99,-60.57 -340.11,-61.64 -341.3,-62.65 -342.53,-63.6 -343.82,-64.48 -345.14,-65.29 -346.51,-66.03 -347.91,-66.7 -349.35,-67.3 -350.82,-67.82 -352.31,-68.26 -353.82,-68.62 -355.35,-68.91 -356.9,-69.11 -358.45,-69.23 -360,-69.27 -361.56,-69.23 -363.11,-69.11 -364.65,-68.91 -366.18,-68.62 -367.7,-68.26 -369.19,-67.82 -370.66,-67.3 -372.09,-66.7 -373.5,-66.03 -374.87,-65.29 -376.19,-64.48 -377.47,-63.6 -378.71,-62.65 -379.89,-61.64 -381.02,-60.57 -382.09,-59.44 -383.1,-58.26 -384.05,-57.02 -384.93,-55.74 -385.75,-54.41 -386.49,-53.04 -387.16,-51.64 -387.75,-50.2 -388.27,-48.73 -388.72,-47.24 -389.08,-45.73 -389.36,-44.2 -389.57,-42.66 -389.69,-41.11
  Bottom Layer region: -310,-39.55 -309.96,-37.99 -309.84,-36.44 -309.64,-34.9 -309.35,-33.37 -308.99,-31.86 -308.55,-30.36 -308.03,-28.9 -307.43,-27.46 -306.76,-26.05 -306.02,-24.69 -305.21,-23.36 -304.33,-22.08 -303.38,-20.84 -302.37,-19.66 -301.3,-18.53 -300.17,-17.46 -298.99,-16.45 -297.75,-15.5 -296.47,-14.62 -295.14,-13.81 -293.77,-13.06 -292.37,-12.39 -290.93,-11.8 -289.47,-11.28 -287.97,-10.84 -286.46,-10.47 -284.93,-10.19 -283.39,-9.99 -281.84,-9.86 -280.28,-9.82 -278.72,-9.86 -277.17,-9.99 -275.63,-10.19 -274.1,-10.47 -272.59,-10.84 -271.09,-11.28 -269.63,-11.8 -268.19,-12.39 -266.78,-13.06 -265.42,-13.81 -264.09,-14.62 -262.81,-15.5 -261.57,-16.45 -260.39,-17.46 -259.26,-18.53 -258.19,-19.66 -257.18,-20.84 -256.23,-22.08 -255.35,-23.36 -254.54,-24.69 -253.8,-26.05 -253.12,-27.46 -252.53,-28.9 -252.01,-30.36 -251.57,-31.86 -251.2,-33.37 -250.92,-34.9 -250.72,-36.44 -250.6,-37.99 -250.55,-39.55 -250.6,-41.11 -250.72,-42.66 -250.92,-44.2 -251.2,-45.73 -251.57,-47.24 -252.01,-48.73 -252.53,-50.2 -253.12,-51.64 -253.8,-53.04 -254.54,-54.41 -255.35,-55.74 -256.23,-57.02 -257.18,-58.26 -258.19,-59.44 -259.26,-60.57 -260.39,-61.64 -261.57,-62.65 -262.81,-63.6 -264.09,-64.48 -265.42,-65.29 -266.78,-66.03 -268.19,-66.7 -269.63,-67.3 -271.09,-67.82 -272.59,-68.26 -274.1,-68.62 -275.63,-68.91 -277.17,-69.11 -278.72,-69.23 -280.28,-69.27 -281.84,-69.23 -283.39,-69.11 -284.93,-68.91 -286.46,-68.62 -287.97,-68.26 -289.47,-67.82 -290.93,-67.3 -292.37,-66.7 -293.77,-66.03 -295.14,-65.29 -296.47,-64.48 -297.75,-63.6 -298.99,-62.65 -300.17,-61.64 -301.3,-60.57 -302.37,-59.44 -303.38,-58.26 -304.33,-57.02 -305.21,-55.74 -306.02,-54.41 -306.76,-53.04 -307.43,-51.64 -308.03,-50.2 -308.55,-48.73 -308.99,-47.24 -309.35,-45.73 -309.64,-44.2 -309.84,-42.66 -309.96,-41.11
  Bottom Layer region: -230,-39.55 -229.96,-37.99 -229.84,-36.44 -229.64,-34.9 -229.35,-33.37 -228.99,-31.86 -228.55,-30.36 -228.03,-28.9 -227.43,-27.46 -226.76,-26.05 -226.02,-24.69 -225.21,-23.36 -224.33,-22.08 -223.38,-20.84 -222.37,-19.66 -221.3,-18.53 -220.17,-17.46 -218.99,-16.45 -217.75,-15.5 -216.47,-14.62 -215.14,-13.81 -213.77,-13.06 -212.37,-12.39 -210.93,-11.8 -209.47,-11.28 -207.97,-10.84 -206.46,-10.47 -204.93,-10.19 -203.39,-9.99 -201.84,-9.86 -200.28,-9.82 -198.72,-9.86 -197.17,-9.99 -195.63,-10.19 -194.1,-10.47 -192.59,-10.84 -191.09,-11.28 -189.63,-11.8 -188.19,-12.39 -186.78,-13.06 -185.42,-13.81 -184.09,-14.62 -182.81,-15.5 -181.57,-16.45 -180.39,-17.46 -179.26,-18.53 -178.19,-19.66 -177.18,-20.84 -176.23,-22.08 -175.35,-23.36 -174.54,-24.69 -173.8,-26.05 -173.12,-27.46 -172.53,-28.9 -172.01,-30.36 -171.57,-31.86 -171.2,-33.37 -170.92,-34.9 -170.72,-36.44 -170.6,-37.99 -170.55,-39.55 -170.6,-41.11 -170.72,-42.66 -170.92,-44.2 -171.2,-45.73 -171.57,-47.24 -172.01,-48.73 -172.53,-50.2 -173.12,-51.64 -173.8,-53.04 -174.54,-54.41 -175.35,-55.74 -176.23,-57.02 -177.18,-58.26 -178.19,-59.44 -179.26,-60.57 -180.39,-61.64 -181.57,-62.65 -182.81,-63.6 -184.09,-64.48 -185.42,-65.29 -186.78,-66.03 -188.19,-66.7 -189.63,-67.3 -191.09,-67.82 -192.59,-68.26 -194.1,-68.62 -195.63,-68.91 -197.17,-69.11 -198.72,-69.23 -200.28,-69.27 -201.84,-69.23 -203.39,-69.11 -204.93,-68.91 -206.46,-68.62 -207.97,-68.26 -209.47,-67.82 -210.93,-67.3 -212.37,-66.7 -213.77,-66.03 -215.14,-65.29 -216.47,-64.48 -217.75,-63.6 -218.99,-62.65 -220.17,-61.64 -221.3,-60.57 -222.37,-59.44 -223.38,-58.26 -224.33,-57.02 -225.21,-55.74 -226.02,-54.41 -226.76,-53.04 -227.43,-51.64 -228.03,-50.2 -228.55,-48.73 -228.99,-47.24 -229.35,-45.73 -229.64,-44.2 -229.84,-42.66 -229.96,-41.11
  Bottom Layer region: -150,-39.55 -149.96,-37.99 -149.84,-36.44 -149.64,-34.9 -149.35,-33.37 -148.99,-31.86 -148.55,-30.36 -148.03,-28.9 -147.43,-27.46 -146.76,-26.05 -146.02,-24.69 -145.21,-23.36 -144.33,-22.08 -143.38,-20.84 -142.37,-19.66 -141.3,-18.53 -140.17,-17.46 -138.99,-16.45 -137.75,-15.5 -136.47,-14.62 -135.14,-13.81 -133.77,-13.06 -132.37,-12.39 -130.93,-11.8 -129.47,-11.28 -127.97,-10.84 -126.46,-10.47 -124.93,-10.19 -123.39,-9.99 -121.84,-9.86 -120.28,-9.82 -118.72,-9.86 -117.17,-9.99 -115.63,-10.19 -114.1,-10.47 -112.59,-10.84 -111.09,-11.28 -109.63,-11.8 -108.19,-12.39 -106.78,-13.06 -105.42,-13.81 -104.09,-14.62 -102.81,-15.5 -101.57,-16.45 -100.39,-17.46 -99.26,-18.53 -98.19,-19.66 -97.18,-20.84 -96.23,-22.08 -95.35,-23.36 -94.54,-24.69 -93.8,-26.05 -93.12,-27.46 -92.53,-28.9 -92.01,-30.36 -91.57,-31.86 -91.2,-33.37 -90.92,-34.9 -90.72,-36.44 -90.6,-37.99 -90.56,-39.55 -90.6,-41.11 -90.72,-42.66 -90.92,-44.2 -91.2,-45.73 -91.57,-47.24 -92.01,-48.73 -92.53,-50.2 -93.12,-51.64 -93.8,-53.04 -94.54,-54.41 -95.35,-55.74 -96.23,-57.02 -97.18,-58.26 -98.19,-59.44 -99.26,-60.57 -100.39,-61.64 -101.57,-62.65 -102.81,-63.6 -104.09,-64.48 -105.42,-65.29 -106.78,-66.03 -108.19,-66.7 -109.63,-67.3 -111.09,-67.82 -112.59,-68.26 -114.1,-68.62 -115.63,-68.91 -117.17,-69.11 -118.72,-69.23 -120.28,-69.27 -121.84,-69.23 -123.39,-69.11 -124.93,-68.91 -126.46,-68.62 -127.97,-68.26 -129.47,-67.82 -130.93,-67.3 -132.37,-66.7 -133.77,-66.03 -135.14,-65.29 -136.47,-64.48 -137.75,-63.6 -138.99,-62.65 -140.17,-61.64 -141.3,-60.57 -142.37,-59.44 -143.38,-58.26 -144.33,-57.02 -145.21,-55.74 -146.02,-54.41 -146.76,-53.04 -147.43,-51.64 -148.03,-50.2 -148.55,-48.73 -148.99,-47.24 -149.35,-45.73 -149.64,-44.2 -149.84,-42.66 -149.96,-41.11
  Bottom Layer region: -70,-39.55 -69.96,-37.99 -69.84,-36.44 -69.64,-34.9 -69.35,-33.37 -68.99,-31.86 -68.55,-30.36 -68.03,-28.9 -67.43,-27.46 -66.76,-26.05 -66.02,-24.69 -65.21,-23.36 -64.33,-22.08 -63.38,-20.84 -62.37,-19.66 -61.3,-18.53 -60.17,-17.46 -58.99,-16.45 -57.75,-15.5 -56.47,-14.62 -55.14,-13.81 -53.77,-13.06 -52.37,-12.39 -50.93,-11.8 -49.47,-11.28 -47.97,-10.84 -46.46,-10.47 -44.93,-10.19 -43.39,-9.99 -41.84,-9.86 -40.28,-9.82 -38.72,-9.86 -37.17,-9.99 -35.63,-10.19 -34.1,-10.47 -32.59,-10.84 -31.09,-11.28 -29.63,-11.8 -28.19,-12.39 -26.78,-13.06 -25.42,-13.81 -24.09,-14.62 -22.81,-15.5 -21.57,-16.45 -20.39,-17.46 -19.26,-18.53 -18.19,-19.66 -17.18,-20.84 -16.23,-22.08 -15.35,-23.36 -14.54,-24.69 -13.8,-26.05 -13.12,-27.46 -12.53,-28.9 -12.01,-30.36 -11.57,-31.86 -11.2,-33.37 -10.92,-34.9 -10.72,-36.44 -10.6,-37.99 -10.56,-39.55 -10.6,-41.11 -10.72,-42.66 -10.92,-44.2 -11.2,-45.73 -11.57,-47.24 -12.01,-48.73 -12.53,-50.2 -13.12,-51.64 -13.8,-53.04 -14.54,-54.41 -15.35,-55.74 -16.23,-57.02 -17.18,-58.26 -18.19,-59.44 -19.26,-60.57 -20.39,-61.64 -21.57,-62.65 -22.81,-63.6 -24.09,-64.48 -25.42,-65.29 -26.78,-66.03 -28.19,-66.7 -29.63,-67.3 -31.09,-67.82 -32.59,-68.26 -34.1,-68.62 -35.63,-68.91 -37.17,-69.11 -38.72,-69.23 -40.28,-69.27 -41.84,-69.23 -43.39,-69.11 -44.93,-68.91 -46.46,-68.62 -47.97,-68.26 -49.47,-67.82 -50.93,-67.3 -52.37,-66.7 -53.77,-66.03 -55.14,-65.29 -56.47,-64.48 -57.75,-63.6 -58.99,-62.65 -60.17,-61.64 -61.3,-60.57 -62.37,-59.44 -63.38,-58.26 -64.33,-57.02 -65.21,-55.74 -66.02,-54.41 -66.76,-53.04 -67.43,-51.64 -68.03,-50.2 -68.55,-48.73 -68.99,-47.24 -69.35,-45.73 -69.64,-44.2 -69.84,-42.66 -69.96,-41.11
  Bottom Layer region: 10.27,-39.55 10.31,-37.99 10.44,-36.44 10.64,-34.9 10.92,-33.37 11.28,-31.86 11.73,-30.36 12.25,-28.9 12.84,-27.46 13.51,-26.05 14.25,-24.69 15.07,-23.36 15.95,-22.08 16.9,-20.84 17.91,-19.66 18.98,-18.53 20.11,-17.46 21.29,-16.45 22.52,-15.5 23.81,-14.62 25.13,-13.81 26.5,-13.06 27.91,-12.39 29.34,-11.8 30.81,-11.28 32.3,-10.84 33.82,-10.47 35.35,-10.19 36.89,-9.99 38.44,-9.86 40,-9.82 41.55,-9.86 43.1,-9.99 44.65,-10.19 46.18,-10.47 47.69,-10.84 49.18,-11.28 50.65,-11.8 52.09,-12.39 53.49,-13.06 54.86,-13.81 56.19,-14.62 57.47,-15.5 58.7,-16.45 59.89,-17.46 61.02,-18.53 62.09,-19.66 63.1,-20.84 64.04,-22.08 64.93,-23.36 65.74,-24.69 66.48,-26.05 67.15,-27.46 67.75,-28.9 68.27,-30.36 68.71,-31.86 69.07,-33.37 69.35,-34.9 69.56,-36.44 69.68,-37.99 69.72,-39.55 69.68,-41.11 69.56,-42.66 69.35,-44.2 69.07,-45.73 68.71,-47.24 68.27,-48.73 67.75,-50.2 67.15,-51.64 66.48,-53.04 65.74,-54.41 64.93,-55.74 64.04,-57.02 63.1,-58.26 62.09,-59.44 61.02,-60.57 59.89,-61.64 58.7,-62.65 57.47,-63.6 56.19,-64.48 54.86,-65.29 53.49,-66.03 52.09,-66.7 50.65,-67.3 49.18,-67.82 47.69,-68.26 46.18,-68.62 44.65,-68.91 43.1,-69.11 41.55,-69.23 40,-69.27 38.44,-69.23 36.89,-69.11 35.35,-68.91 33.82,-68.62 32.3,-68.26 30.81,-67.82 29.34,-67.3 27.91,-66.7 26.5,-66.03 25.13,-65.29 23.81,-64.48 22.52,-63.6 21.29,-62.65 20.11,-61.64 18.98,-60.57 17.91,-59.44 16.9,-58.26 15.95,-57.02 15.07,-55.74 14.25,-54.41 13.51,-53.04 12.84,-51.64 12.25,-50.2 11.73,-48.73 11.28,-47.24 10.92,-45.73 10.64,-44.2 10.44,-42.66 10.31,-41.11
  Bottom Layer region: 90,-39.55 90.04,-37.99 90.16,-36.44 90.36,-34.9 90.65,-33.37 91.01,-31.86 91.45,-30.36 91.97,-28.9 92.57,-27.46 93.24,-26.05 93.98,-24.69 94.79,-23.36 95.67,-22.08 96.62,-20.84 97.63,-19.66 98.7,-18.53 99.83,-17.46 101.01,-16.45 102.25,-15.5 103.53,-14.62 104.86,-13.81 106.23,-13.06 107.63,-12.39 109.07,-11.8 110.53,-11.28 112.03,-10.84 113.54,-10.47 115.07,-10.19 116.61,-9.99 118.16,-9.86 119.72,-9.82 121.28,-9.86 122.83,-9.99 124.37,-10.19 125.9,-10.47 127.41,-10.84 128.91,-11.28 130.37,-11.8 131.81,-12.39 133.22,-13.06 134.58,-13.81 135.91,-14.62 137.19,-15.5 138.43,-16.45 139.61,-17.46 140.74,-18.53 141.81,-19.66 142.82,-20.84 143.77,-22.08 144.65,-23.36 145.46,-24.69 146.2,-26.05 146.88,-27.46 147.47,-28.9 147.99,-30.36 148.43,-31.86 148.8,-33.37 149.08,-34.9 149.28,-36.44 149.4,-37.99 149.44,-39.55 149.4,-41.11 149.28,-42.66 149.08,-44.2 148.8,-45.73 148.43,-47.24 147.99,-48.73 147.47,-50.2 146.88,-51.64 146.2,-53.04 145.46,-54.41 144.65,-55.74 143.77,-57.02 142.82,-58.26 141.81,-59.44 140.74,-60.57 139.61,-61.64 138.43,-62.65 137.19,-63.6 135.91,-64.48 134.58,-65.29 133.22,-66.03 131.81,-66.7 130.37,-67.3 128.91,-67.82 127.41,-68.26 125.9,-68.62 124.37,-68.91 122.83,-69.11 121.28,-69.23 119.72,-69.27 118.16,-69.23 116.61,-69.11 115.07,-68.91 113.54,-68.62 112.03,-68.26 110.53,-67.82 109.07,-67.3 107.63,-66.7 106.23,-66.03 104.86,-65.29 103.53,-64.48 102.25,-63.6 101.01,-62.65 99.83,-61.64 98.7,-60.57 97.63,-59.44 96.62,-58.26 95.67,-57.02 94.79,-55.74 93.98,-54.41 93.24,-53.04 92.57,-51.64 91.97,-50.2 91.45,-48.73 91.01,-47.24 90.65,-45.73 90.36,-44.2 90.16,-42.66 90.04,-41.11
  Bottom Layer region: 170,-39.55 170.04,-37.99 170.16,-36.44 170.36,-34.9 170.65,-33.37 171.01,-31.86 171.45,-30.36 171.97,-28.9 172.57,-27.46 173.24,-26.05 173.98,-24.69 174.79,-23.36 175.67,-22.08 176.62,-20.84 177.63,-19.66 178.7,-18.53 179.83,-17.46 181.01,-16.45 182.25,-15.5 183.53,-14.62 184.86,-13.81 186.23,-13.06 187.63,-12.39 189.07,-11.8 190.53,-11.28 192.03,-10.84 193.54,-10.47 195.07,-10.19 196.61,-9.99 198.16,-9.86 199.72,-9.82 201.28,-9.86 202.83,-9.99 204.37,-10.19 205.9,-10.47 207.41,-10.84 208.91,-11.28 210.37,-11.8 211.81,-12.39 213.22,-13.06 214.58,-13.81 215.91,-14.62 217.19,-15.5 218.43,-16.45 219.61,-17.46 220.74,-18.53 221.81,-19.66 222.82,-20.84 223.77,-22.08 224.65,-23.36 225.46,-24.69 226.2,-26.05 226.88,-27.46 227.47,-28.9 227.99,-30.36 228.43,-31.86 228.8,-33.37 229.08,-34.9 229.28,-36.44 229.4,-37.99 229.44,-39.55 229.4,-41.11 229.28,-42.66 229.08,-44.2 228.8,-45.73 228.43,-47.24 227.99,-48.73 227.47,-50.2 226.88,-51.64 226.2,-53.04 225.46,-54.41 224.65,-55.74 223.77,-57.02 222.82,-58.26 221.81,-59.44 220.74,-60.57 219.61,-61.64 218.43,-62.65 217.19,-63.6 215.91,-64.48 214.58,-65.29 213.22,-66.03 211.81,-66.7 210.37,-67.3 208.91,-67.82 207.41,-68.26 205.9,-68.62 204.37,-68.91 202.83,-69.11 201.28,-69.23 199.72,-69.27 198.16,-69.23 196.61,-69.11 195.07,-68.91 193.54,-68.62 192.03,-68.26 190.53,-67.82 189.07,-67.3 187.63,-66.7 186.23,-66.03 184.86,-65.29 183.53,-64.48 182.25,-63.6 181.01,-62.65 179.83,-61.64 178.7,-60.57 177.63,-59.44 176.62,-58.26 175.67,-57.02 174.79,-55.74 173.98,-54.41 173.24,-53.04 172.57,-51.64 171.97,-50.2 171.45,-48.73 171.01,-47.24 170.65,-45.73 170.36,-44.2 170.16,-42.66 170.04,-41.11
  Bottom Layer region: 250,-39.55 250.04,-37.99 250.16,-36.44 250.36,-34.9 250.65,-33.37 251.01,-31.86 251.45,-30.36 251.97,-28.9 252.57,-27.46 253.24,-26.05 253.98,-24.69 254.79,-23.36 255.67,-22.08 256.62,-20.84 257.63,-19.66 258.7,-18.53 259.83,-17.46 261.01,-16.45 262.25,-15.5 263.53,-14.62 264.86,-13.81 266.23,-13.06 267.63,-12.39 269.07,-11.8 270.53,-11.28 272.03,-10.84 273.54,-10.47 275.07,-10.19 276.61,-9.99 278.16,-9.86 279.72,-9.82 281.28,-9.86 282.83,-9.99 284.37,-10.19 285.9,-10.47 287.41,-10.84 288.91,-11.28 290.37,-11.8 291.81,-12.39 293.22,-13.06 294.58,-13.81 295.91,-14.62 297.19,-15.5 298.43,-16.45 299.61,-17.46 300.74,-18.53 301.81,-19.66 302.82,-20.84 303.77,-22.08 304.65,-23.36 305.46,-24.69 306.2,-26.05 306.88,-27.46 307.47,-28.9 307.99,-30.36 308.43,-31.86 308.8,-33.37 309.08,-34.9 309.28,-36.44 309.4,-37.99 309.44,-39.55 309.4,-41.11 309.28,-42.66 309.08,-44.2 308.8,-45.73 308.43,-47.24 307.99,-48.73 307.47,-50.2 306.88,-51.64 306.2,-53.04 305.46,-54.41 304.65,-55.74 303.77,-57.02 302.82,-58.26 301.81,-59.44 300.74,-60.57 299.61,-61.64 298.43,-62.65 297.19,-63.6 295.91,-64.48 294.58,-65.29 293.22,-66.03 291.81,-66.7 290.37,-67.3 288.91,-67.82 287.41,-68.26 285.9,-68.62 284.37,-68.91 282.83,-69.11 281.28,-69.23 279.72,-69.27 278.16,-69.23 276.61,-69.11 275.07,-68.91 273.54,-68.62 272.03,-68.26 270.53,-67.82 269.07,-67.3 267.63,-66.7 266.23,-66.03 264.86,-65.29 263.53,-64.48 262.25,-63.6 261.01,-62.65 259.83,-61.64 258.7,-60.57 257.63,-59.44 256.62,-58.26 255.67,-57.02 254.79,-55.74 253.98,-54.41 253.24,-53.04 252.57,-51.64 251.97,-50.2 251.45,-48.73 251.01,-47.24 250.65,-45.73 250.36,-44.2 250.16,-42.66 250.04,-41.11
  Bottom Layer region: 330,-39.55 330.04,-37.99 330.16,-36.44 330.36,-34.9 330.65,-33.37 331.01,-31.86 331.45,-30.36 331.97,-28.9 332.57,-27.46 333.24,-26.05 333.98,-24.69 334.79,-23.36 335.67,-22.08 336.62,-20.84 337.63,-19.66 338.7,-18.53 339.83,-17.46 341.01,-16.45 342.25,-15.5 343.53,-14.62 344.86,-13.81 346.23,-13.06 347.63,-12.39 349.07,-11.8 350.53,-11.28 352.03,-10.84 353.54,-10.47 355.07,-10.19 356.61,-9.99 358.16,-9.86 359.72,-9.82 361.28,-9.86 362.83,-9.99 364.37,-10.19 365.9,-10.47 367.41,-10.84 368.91,-11.28 370.37,-11.8 371.81,-12.39 373.22,-13.06 374.58,-13.81 375.91,-14.62 377.19,-15.5 378.43,-16.45 379.61,-17.46 380.74,-18.53 381.81,-19.66 382.82,-20.84 383.77,-22.08 384.65,-23.36 385.46,-24.69 386.2,-26.05 386.88,-27.46 387.47,-28.9 387.99,-30.36 388.43,-31.86 388.8,-33.37 389.08,-34.9 389.28,-36.44 389.4,-37.99 389.44,-39.55 389.4,-41.11 389.28,-42.66 389.08,-44.2 388.8,-45.73 388.43,-47.24 387.99,-48.73 387.47,-50.2 386.88,-51.64 386.2,-53.04 385.46,-54.41 384.65,-55.74 383.77,-57.02 382.82,-58.26 381.81,-59.44 380.74,-60.57 379.61,-61.64 378.43,-62.65 377.19,-63.6 375.91,-64.48 374.58,-65.29 373.22,-66.03 371.81,-66.7 370.37,-67.3 368.91,-67.82 367.41,-68.26 365.9,-68.62 364.37,-68.91 362.83,-69.11 361.28,-69.23 359.72,-69.27 358.16,-69.23 356.61,-69.11 355.07,-68.91 353.54,-68.62 352.03,-68.26 350.53,-67.82 349.07,-67.3 347.63,-66.7 346.23,-66.03 344.86,-65.29 343.53,-64.48 342.25,-63.6 341.01,-62.65 339.83,-61.64 338.7,-60.57 337.63,-59.44 336.62,-58.26 335.67,-57.02 334.79,-55.74 333.98,-54.41 333.24,-53.04 332.57,-51.64 331.97,-50.2 331.45,-48.73 331.01,-47.24 330.65,-45.73 330.36,-44.2 330.16,-42.66 330.04,-41.11
IC_BME688 [mm]
  rect 0.4x0.4 smd: 1(1.2,1.2) 2(1.2,0.4) 3(1.2,-0.4) 4(1.2,-1.2) 5(-1.2,-1.2) 6(-1.2,-0.4) 7(-1.2,0.4) 8(-1.2,1.2)
  silkscreen extent -1.5,-1.72 2.14,1.72, body extent -1.5,-1.5 1.5,1.5, height 1
IC_W25Q16JVUXIQ_TR [mm]
  rect 0.6x0.3 smd paste-1: 1(-1.25,0.75) 2(-1.25,0.25) 3(-1.25,-0.25) 4(-1.25,-0.75) 5(1.25,-0.75) 6(1.25,-0.25) 7(1.25,0.25) 8(1.25,0.75)
  rect 0.3x1.7 smd paste-2: 9(0,0)
  silkscreen extent -2.26,-1 0.63,1, body extent -1.5,-1 1.5,1, height 0.6
IND-SMD_L2.5-W2.0_SWPA252012S [mm]
  rect 1x2.2 smd: 1(-0.95,0) 2(0.95,0)
  silkscreen extent -1.24,-1.3 1.26,1.32, body extent -1.25,-1 1.25,1, height 1.2
INDC0603X33N [mm]
  rect 0.38x0.269 smd mask+0.051: 1(-0.281,0) 2(0.281,0)
  body extent -0.3,-0.15 0.3,0.15, height 0.33
INDC1006X60N [mm]
  rect 0.51x0.73 smd: 1(-0.46,0) 2(0.46,0)
  body extent -0.5,-0.3 0.5,0.3, height 0.6
JUMPA [mil]
  rect 10x10 smd: 1(-14,0) 2(11,0)
  Top Layer region: -6,-2 -3,-2 -3,2 -6,2
  Top Layer region: -13,5 -6,5 -6,-5 -13,-5
  Top Layer region: 0,-5 8,-5 8,5 0,5 0,4 4,0 0,-4
  Top Layer lines w2: 0.49,4.39 4,0 0,-4 ; -2,0 -6,4 -6,-4 -2,0
JumpA [mil]
  rect 10x10 smd: 1(-14,0) 2(11,0)
  Top Layer region: -6,-2 -3,-2 -3,2 -6,2
  Top Layer region: -13,5 -6,5 -6,-5 -13,-5
  Top Layer region: 0,-5 8,-5 8,5 0,5 0,4 4,0 0,-4
  Top Layer lines w2: 0.49,4.39 4,0 0,-4 ; -2,0 -6,4 -6,-4 -2,0
LEDM1608X80 [mm]
  rect 0.8x0.8 smd: A(0.75,0) C(-0.75,0)
  silkscreen extent -1.83,0.27 -1.57,0.53, body extent -0.8,-0.4 0.8,0.4, height 0.8
PQFN50P450X300X100-16N [mm]
  rect 0.35x0.59 smd: 1(-1.5,1.165) 2(-1,1.165) 3(-0.5,1.165) 4(0,1.165) 5(0.5,1.165) 6(1,1.165) 7(1.5,1.165) 9(1.5,-1.165) 10(1,-1.165) 11(0.5,-1.165) 12(0,-1.165) 13(-0.5,-1.165) 14(-1,-1.165) 15(-1.5,-1.165)
  rect 0.59x0.35 smd: 8(1.915,0) 16(-1.915,0)
  silkscreen extent -2.25,-1.5 2.25,2.2, body extent -2.25,-1.5 2.25,1.5, height 1
QFN50P500X500X90-33N [mm]
  rrect25% 0.81x0.27 smd mask+0: 1(-2.445,1.75) 2(-2.445,1.25) 3(-2.445,0.75) 4(-2.445,0.25) 5(-2.445,-0.25) 6(-2.445,-0.75) 7(-2.445,-1.25) 8(-2.445,-1.75) 17(2.445,-1.75) 18(2.445,-1.25) 19(2.445,-0.75) 20(2.445,-0.25) 21(2.445,0.25) 22(2.445,0.75) 23(2.445,1.25) 24(2.445,1.75)
  rrect25% 0.27x0.81 smd mask+0: 9(-1.75,-2.445) 10(-1.25,-2.445) 11(-0.75,-2.445) 12(-0.25,-2.445) 13(0.25,-2.445) 14(0.75,-2.445) 15(1.25,-2.445) 16(1.75,-2.445) 25(1.75,2.445) 26(1.25,2.445) 27(0.75,2.445) 28(0.25,2.445) 29(-0.25,2.445) 30(-0.75,2.445) 31(-1.25,2.445) 32(-1.75,2.445)
  rect 3.7x3.7 smd paste-0.68 mask+0.05: 33(0,0)
  silkscreen extent -3.5,-2.5 2.5,2.5, body extent -2.5,-2.5 2.5,2.5, height 0.9
RC0402 [mm]
  rrect53% 0.54x0.6 smd: 1(-0.43,0) 2(0.43,0)
  silkscreen extent -0.5,-0.48 0.5,0.48, body extent -0.52,-0.28 0.52,0.28, height 0.56
RC0402X [mm]
  rrect53% 0.54x0.6 smd: 1(-0.43,0) 2(0.43,0)
  silkscreen extent -0.5,-0.48 0.5,0.48, body extent -0.5,-0.25 0.5,0.25, height 0.4
SHT4X [mm]
  rect 0.5x0.3 smd: 1(-0.7,0.4) 2(-0.7,-0.4) 3(0.7,-0.4) 4(0.7,0.4)
  silkscreen extent -1.05,-0.75 0.7,0.85, body extent -0.75,-0.75 0.75,0.75, height 0.69
SOT23-6L_STM [mil]
  rect 38.5x22 smd paste+0 mask+0: 1(-53.75,37.4) 2(-53.75,0) 3(-53.75,-37.4) 4(53.75,-37.4) 5(53.75,0) 6(53.75,37.4)
  silkscreen extent -40,-65 40,65, body extent -59,-60 59,60, height 57
SOT95P280X145-5N [mm]
  rect 1.32x0.6 smd: 1(-1.15,0.95) 2(-1.15,0) 3(-1.15,-0.95) 4(1.15,-0.95) 5(1.15,0.95)
  silkscreen extent -2.6,-1.56 0.8,1.56, body extent -1.4,-1.45 1.4,1.45, height 1.45
SW [mil]
  rect 60x60 smd: 1(-99,0) 2(100,0)
  silkscreen extent -94,-55 94,56, body extent -94,-57 94,57, height 87
TP [mil]
  round 15 smd mask+1: 1(0,0)
XDCR_AMCA31-2R450G-S1F-T3 [mm]
  rect 0.8x1.6 smd: 1(-1.7,0) 2(1.7,0)
  silkscreen extent -2.66,-0.8 0.6,0.8, body extent -1.6,-0.8 1.6,0.8, height 1.2
XTAL_ECS-400-18-33-JGN-TR3 [mm]
  rect 1.3x1.1 smd: 1(-1.15,-0.9) 2(1.15,-0.9) 3(1.15,0.9) 4(-1.15,0.9)
  silkscreen extent -2.45,-1.25 0.27,1.25, body extent -1.6,-1.25 1.6,1.25, height 0.8
? [mil]